# Allegro board PROCESSING-DBG.brd
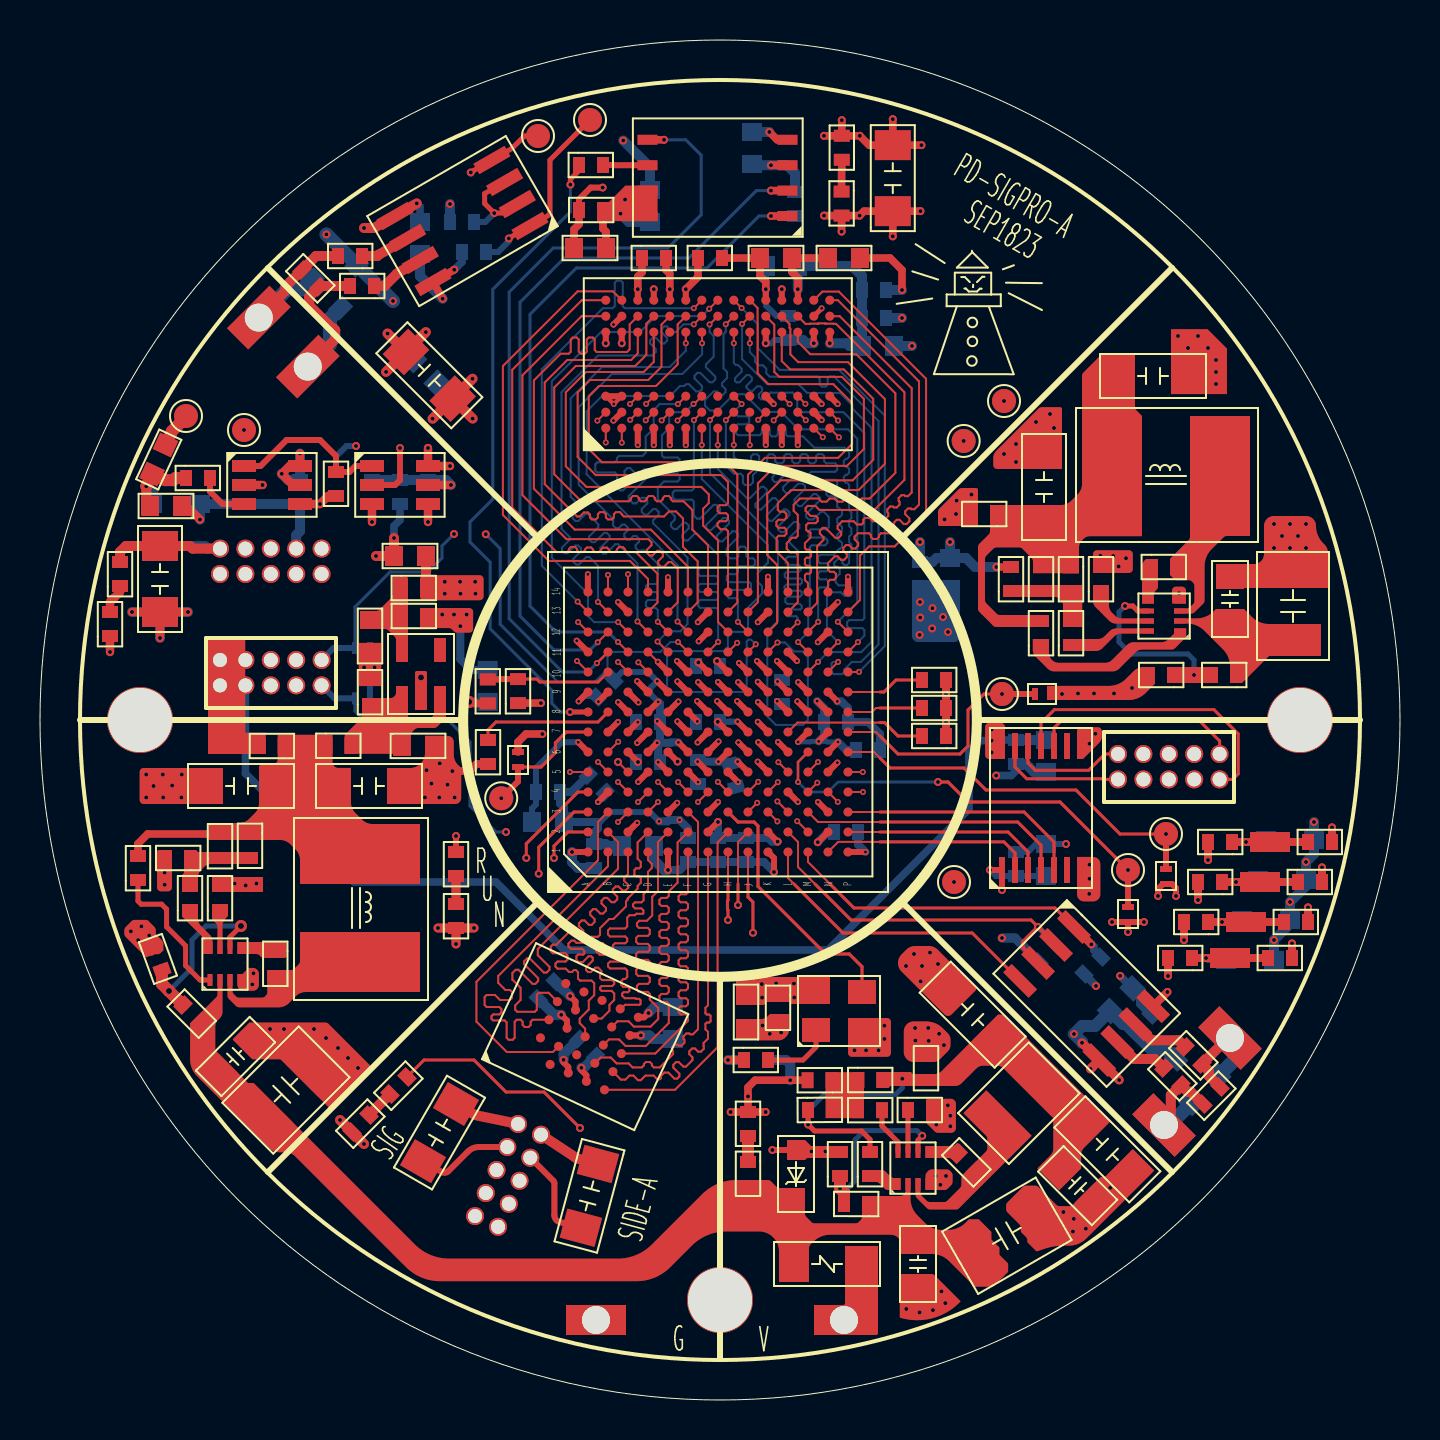
[diagram p0: board, top side]
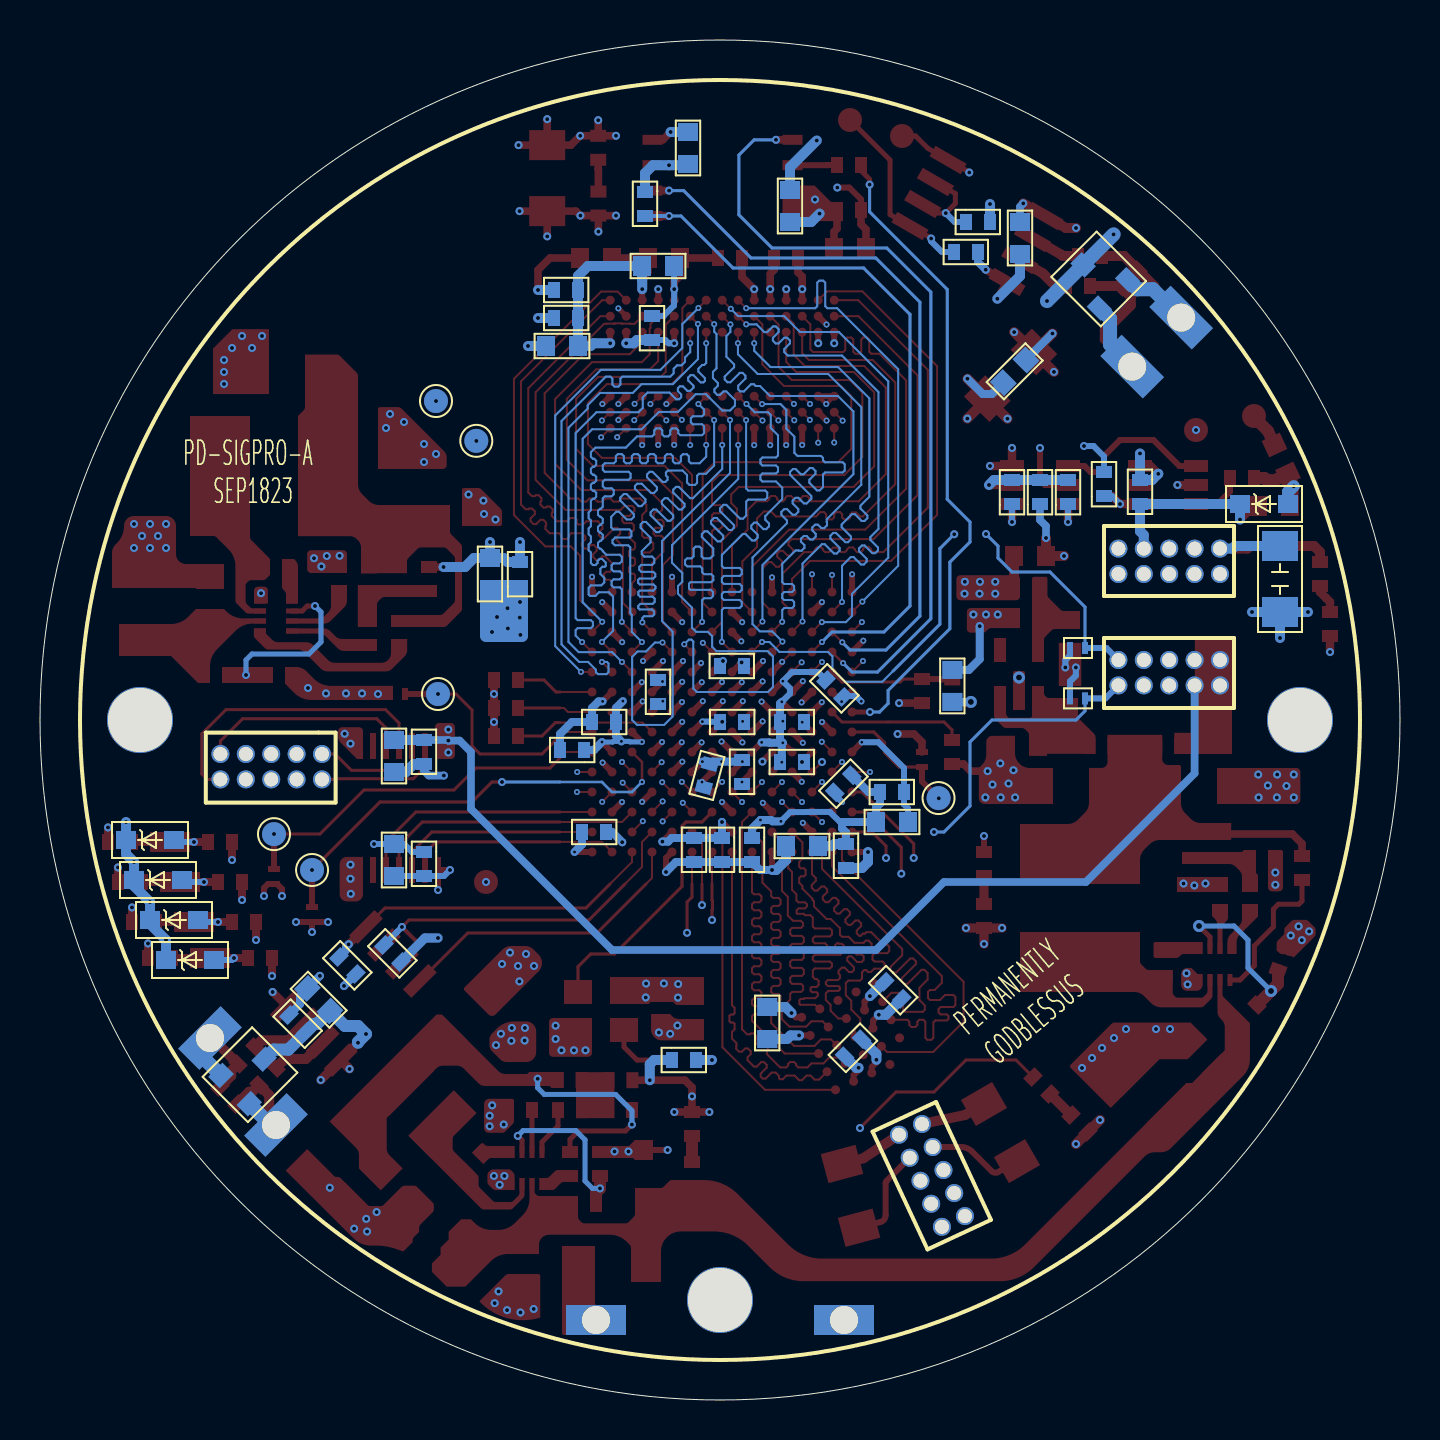
[diagram p1: board, bottom side, seen from below]

Outline 68 x 68 mm; copper layers: TOP, GND-2, VCC-3, SIGNAL-4, GND-5, BOTTOM. Coordinates in mm from the lower left corner of the outline.
Outline path: circle c34,34 r34

## Design rules (mm)
constraint set DEFAULT: min track width 0.152, pair gap 0.152
net group MG1: nets A0 A1 A2 A3 A4 A5 A6 A7 A8 A9 A10 A11 BA0 BA1 CAS CS RAS RCKE RCLK WE
net group MG2: nets S_CLK S_CS S_DQ0 S_DQ1 S_DQ2 S_DQ3 S_DQ4 S_DQ5 S_DQ6 S_DQ7 S_RST S_RWDS
net group MG4: nets DQ0 DQ1 DQ2 DQ3 DQ4 DQ5 DQ6 DQ7 DQM0
net group MG5: nets DQ8 DQ9 DQ10 DQ11 DQ12 DQ13 DQ14 DQ15 DQM1
net group MG6: nets DQ16 DQ17 DQ18 DQ19 DQ20 DQ21 DQ22 DQ23 DQM2
net group MG7: nets DQ24 DQ25 DQ26 DQ27 DQ28 DQ29 DQ30 DQ31 DQM3

## Placement (name value [footprint] x y rotation side)
C1  100nF/25V  [C0402]  28.15 59.5 180 top
C2  1uF/16V  [C0603]  28.3 57.6 180 top
C3  1uF/16V  [C0603]  36 57.1 0 top
C4  1uF/16V  [C0603]  39.4 57.1 0 top
C5  100nF/25V  [C0402]  30.1 57.1 0 top
C6  100nF/25V  [C0402]  32.9 57.1 0 top
C7  22uF/10V  [C1206]  54 51.2 0 top
C8  22uF/10V  [C1206]  50.2 44 90 top
C9  22uF/10V  [C1206]  6 42.7 270 bottom
C10  1uF/16V  [C0603]  19.3 42.2 180 top
C11  100nF/25V  [C0402]  55.6 41.65 0 top
C12  22uF/10V  [C1206]  6 42.7 270 top
C13  470pF/6.3V  [C0402]  50.05 40.45 90 top
C14  22nF/25V  [C0402]  53.05 40.45 90 top
C15  0.1uF/50V  [C0805]  59.5 38.95 90 top
C16  22uF/25V  [C1210]  62.65 41.4 270 top
C17  100nF/25V  [C0402]  18.1 39.2 0 top
C18  1uF/16V  [C0603]  16.5 39 270 top
C19  100nF/25V  [C0402]  16.5 34.8 90 top
C20  1uF/16V  [C0603]  18.1 32.7 0 top
C21  22uF/10V  [C1206]  11.7 30.7 180 top
C22  22uF/10V  [C1206]  14.8 30.7 0 top
C23  0.1uF/16V  [C0402]  63.4 27.9 0 top
C24  300pF/6.3V  [C0402]  9 27.1 90 top
C25  0.1uF/16V  [C0402]  62.9 25.9 0 top
C26  22nF/25V  [C0402]  9 24.5 90 top
C27  0.1uF/16V  [C0402]  62.2 23.9 0 top
C28  0.1uF/16V  [C0402]  61.4 22.1 0 top
C29  100nF/25V  [C0402]  11.76 22.4 270 top
C30  100nF/25V  [C0402]  36.9 20.2 270 top
C31  1uF/16V  [C0603]  35.3 20.2 270 top
C32  22uF/10V  [C1206]  47.8 18.1 135 top
C33  0.1uF/50V  [C0805]  9 16.4 45 top
C34  82pF/6.3V  [C0402]  40.92 16 0 top
C35  22uF/25V  [C1210]  13.5 16.7 225 top
C36  22nF/25V  [C0402]  43.4 14.5 0 top
C37  22uF/10V  [C1206]  52.2 13.7 315 top
C38  100nF/25V  [C0402]  45.9 12.3 315 top
C39  0.1uF/50V  [C0805]  51.11 11.5 315 top
C40  22uF/25V  [C1210]  49.82 9.06 210 top
C41  0.1uF/50V  [C0805]  43.9 7.9 270 top
C42  1uF/16V  [C0603]  35.6 61.8 90 bottom
C43  1uF/16V  [C0603]  30.5 58.9 90 bottom
C44  1uF/16V  [C0603]  19 57.3 90 bottom
C45  1uF/16V  [C0603]  37.9 56.7 180 bottom
C46  100nF/25V  [C0402]  41.1 55.5 0 bottom
C47  100nF/25V  [C0402]  41.1 54.1 0 bottom
C48  100nF/25V  [C0402]  37.4 53 90 bottom
C49  1uF/16V  [C0603]  41.1 52.7 0 bottom
C50  1uF/16V  [C0603]  45.5 40.5 90 bottom
C51  100nF/25V  [C0402]  44 40.7 90 bottom
C52  100nF/25V  [C0402]  34 36.7 180 bottom
C53  100nF/25V  [C0402]  28.7 36 225 bottom
C54  1uF/16V  [C0603]  22.38 34.9 90 bottom
C55  100nF/25V  [C0402]  37.1 36 270 bottom
C56  100nF/25V  [C0402]  39.2 33.9 0 bottom
C57  100nF/25V  [C0402]  32.8 33.9 0 bottom
C58  100nF/25V  [C0402]  31 33.9 180 bottom
C59  100nF/25V  [C0402]  26 30.4 180 bottom
C60  100nF/25V  [C0402]  40.8 32.5 0 bottom
C61  100nF/25V  [C0402]  27.41 31.24 315 bottom
C62  100nF/25V  [C0402]  48.8 33 270 bottom
C63  1uF/16V  [C0603]  50.3 33 270 bottom
C64  100nF/25V  [C0402]  31 31.9 180 bottom
C65  100nF/25V  [C0402]  32.9 32 270 bottom
C66  100nF/25V  [C0402]  34.5 31.8 285 bottom
C67  1uF/16V  [C0603]  26.2 28.9 180 bottom
C68  100nF/25V  [C0402]  39.7 28.4 0 bottom
C69  1uF/16V  [C0603]  29.1 27.7 0 bottom
C70  100nF/25V  [C0402]  35.3 28.1 270 bottom
C71  100nF/25V  [C0402]  33.9 28.1 270 bottom
C72  100nF/25V  [C0402]  32.4 28.1 270 bottom
C73  100nF/25V  [C0402]  27.7 27.8 270 bottom
C74  1uF/16V  [C0603]  50.3 27.8 270 bottom
C75  100nF/25V  [C0402]  48.8 27.4 270 bottom
C76  100nF/25V  [C0402]  25.76 20.91 225 bottom
C77  1uF/16V  [C0603]  53.5 19.45 45 bottom
C78  1uF/16V  [C0603]  31.64 18.05 90 bottom
C79  100nF/25V  [C0402]  54.7 18.4 45 bottom
C80  100nF/25V  [C0402]  27.77 17.19 135 bottom
C81  100nF/25V  [C0402]  36.4 17 180 bottom
C82  22uF/10V  [C1206]  27.9 11.8 255 top
C83  22uF/10V  [C1206]  20.8 14.8 240 top
C84  22uF/10V  [C1206]  18.3 52.4 315 top
C85  22uF/10V  [C1206]  42.64 59.44 90 top
C86  100nF/25V  [C0402]  18 44.8 90 bottom
C87  1uF/16V  [C0603]  18.7 52 315 bottom
C88  100nF/25V  [C0402]  13 46 270 bottom
D1  LED  [LED0402]  40.09 63.21 270 top
D2  LED  [LED0402]  3.5 38.2 90 top
D3  PTVS4V5D1BLYL  [SOD-882]  50.5 35.3 180 top
D4  PTVS4V5D1BLYL  [SOD-882]  23.9 32.4 270 top
D5  PTVS4V5D1BLYL  [SOD-882]  56.3 25.8 90 top
D6  PTVS4V5D1BLYL  [SOD-882]  54.4 23.9 90 top
D7  LED  [LED0402]  20.8 23.6 90 top
D8  LED  [LED0402]  15.6 13.4 45 top
D9  LED  [LED0402]  35.4 14.4 270 top
D10  PSD24-N  [SOD-323]  37.8 10.1 90 top
D11  PTVSLC3D3V3B  [SOD-323]  63.7 28 180 bottom
D12  PTVSLC3D3V3B  [SOD-323]  63.3 26 180 bottom
D13  PTVSLC3D3V3B  [SOD-323]  62.5 24 180 bottom
D14  PTVSLC3D3V3B  [SOD-323]  61.7 22 180 bottom
D15  PTVS4V5D1BLYL  [SOD-882]  16.5 37.6 180 bottom
D16  PTVS4V5D1BLYL  [SOD-882]  16.5 35.08 180 bottom
D17  PTVSLC3D3V3B  [SOD-323]  8 44.8 180 bottom
F1  24V/0.5A  [F1206]  37.7 6.8 0 top
J1  Conn-2x5  [CONN-2X5-1D27]  9 37 0 top
J2  Conn-2x5  [CONN-2X5-1D27]  53.9 32.3 0 top
J3  Conn-2x5  [CONN-2X5-1D27]  9 41.3 0 bottom
J4  Conn-2x5  [CONN-2X5-1D27]  23.9 13.8 245 bottom
L1  6.8uH/2A  [IND_SMD_6D0X6D0]  53.6 46.2 0 top
L2  6.8uH/2A  [IND_SMD_6D0X6D0]  16 27.3 270 top
L3  2.2uH/2A  [IND_SMD_3D0X3D0]  50 15.9 225 top
NOREF  -  [unnamed]  63 34 0 top
NOREF#2  -  [#2]  3.87 44.79 0 top
NOREF#3  -  [unnamed]  5 34 0 top
NOREF#4  -  [#2]  1.06 42.42 0 top
NOREF#5  -  [unnamed]  34 5 0 top
NOREF#6  -  [#2]  5 34 0 top
R1  100R  [R0402]  26.95 61.75 0 top
R2  1K  [C0402]  40.08 60.42 270 top
R3  0  [R0402]  16.1 57.2 180 top
R4  120R  [R0402]  13.1 56.5 315 top
R5  0  [R0402]  16.7 55.7 180 top
R6  2K  [C0402]  4 40.7 90 top
R7  0  [R0402]  47.8 44.3 180 top
R8  -  [R0402]  48.55 40.45 90 top
R9  51K  [R0402]  51.55 41.63 270 top
R10  0  [R0402]  18.1 40.6 0 top
R11  100K  [R0402]  50.05 37.75 90 top
R12  10K  [R0402]  51.55 37.75 90 top
R13  41.9K  [R0402]  56.65 36.25 180 top
R14  191K  [R0402]  59.8 36.25 180 top
R15  330R  [R0402]  45.3 36 180 top
R16  1K  [R0402]  22.39 36.03 270 top
R17  DNP  [R0402]  23.9 34.85 90 top
R18  4.99K  [R0402]  45.3 34.6 180 top
R19  4.99K  [R0402]  45.3 33.2 180 top
R20  0  [R0402]  12.19 32.7 180 top
R21  0  [R0402]  14.33 32.71 0 top
R22  0R  [R0402]  22.4 31.8 90 top
R23  10K  [R0402]  59.6 27.9 180 top
R24  90.9K  [R0402]  10.5 28.3 270 top
R25  10K  [R0402]  7.5 27.1 180 top
R26  2K  [C0402]  20.8 26.2 90 top
R27  100K  [R0402]  4.9 26 90 top
R28  10K  [R0402]  59.1 25.9 180 top
R29  10K  [R0402]  7.5 24.5 90 top
R30  10K  [R0402]  58.4 23.9 180 top
R31  10K  [R0402]  57.6 22.1 180 top
R32  41.9K  [R0402]  6.1 21.5 110 top
R33  191K  [R0402]  8 18.9 135 top
R34  0  [R0402]  57.25 17.65 315 top
R35  0R  [R0402]  35.2 17 0 top
R36  0  [R0402]  44.3 16 90 top
R37  0  [R0402]  56.2 16.6 315 top
R38  51K  [R0402]  39.58 15.99 180 top
R39  2K  [C0402]  17.5 15.3 45 top
R40  120R  [R0402]  58.15 14.8 45 top
R41  51K  [R0402]  38.4 14.5 0.3 top
R42  10K  [R0402]  42.1 14.49 180 top
R43  41.9K  [R0402]  40 11.2 90 top
R44  100K  [R0402]  41.5 11.2 90 top
R45  2K  [C0402]  35.4 11.9 270 top
R46  191K  [R0402]  41.4 9.8 179.9 top
R47  2K  [R0402]  37.75 60.4 270 bottom
R48  10K  [R0402]  21.7 58.9 180 bottom
R49  10K  [R0402]  22.3 57.4 180 bottom
R50  10K  [R0402]  50.8 22.75 225 bottom
R51  10K  [R0402]  53.05 22.15 225 bottom
R52  4.7K  [R0402]  19.4 44.8 90 bottom
R53  4.7K  [R0402]  16.6 44.8 90 bottom
R54  100K  [R0402]  14.8 46.4 270 top
R55  10K  [R0402]  14.8 45.2 90 bottom
R56  DNP  [R0603]  5.6 46.3 65 top
R57  DNP  [R0603]  7.1 44.7 180 top
R58  10K  [R0402]  7.3 46.1 0 top
TP1  T POINT R  [TP_SMD_1D2]  27.5 64 0 top
TP2  T POINT R  [TP_SMD_1D2]  24.9 63.2 0 top
TP3  T POINT F  [STAMP_HOLE_1D5X3D0_1D4]  10.94 54.12 135 top
TP4  T POINT F  [STAMP_HOLE_1D5X3D0_1D4]  13.39 51.67 135 top
TP5  T POINT R  [TP_SMD_1D2]  48.1 35.3 0 top
TP6  T POINT R  [TP_SMD_1D2]  46.18 47.95 0 top
TP7  T POINT R  [TP_SMD_1D2]  48.2 49.95 0 top
TP8  T POINT R  [TP_SMD_1D2]  23.06 30.09 0 top
TP9  T POINT R  [TP_SMD_1D2]  56.3 28.3 0 top
TP10  T POINT S  [TP_SMD_REC_1D0X2D0]  61.5 27.9 270 top
TP11  T POINT R  [TP_SMD_1D2]  54.4 26.5 0 top
TP12  T POINT R  [TP_SMD_1D2]  45.7 25.9 0 top
TP13  T POINT S  [TP_SMD_REC_1D0X2D0]  61 25.9 270 top
TP14  T POINT S  [TP_SMD_REC_1D0X2D0]  60.3 23.9 90 top
TP15  T POINT S  [TP_SMD_REC_1D0X2D0]  59.5 22.1 270 top
TP16  T POINT F  [STAMP_HOLE_1D5X3D0_1D4]  59.5 18.1 225 top
TP17  T POINT F  [STAMP_HOLE_1D5X3D0_1D4]  56.2 13.75 225 top
TP18  T POINT F  [STAMP_HOLE_1D5X3D0_1D4]  27.8 4 90 top
TP19  T POINT F  [STAMP_HOLE_1D5X3D0_1D4]  40.2 4 270 top
TP20  T POINT R  [TP_SMD_1D2]  48.1 35.3 180 bottom
TP21  T POINT R  [TP_SMD_1D2]  56.3 28.29 180 bottom
TP22  T POINT R  [TP_SMD_1D2]  23.07 30.1 180 bottom
TP23  T POINT R  [TP_SMD_1D2]  54.4 26.5 180 bottom
TP24  T POINT R  [TP_SMD_1D2]  46.19 47.96 180 bottom
TP25  T POINT R  [TP_SMD_1D2]  48.2 49.95 180 bottom
TP26  T POINT R  [TP_SMD_1D2]  7.3 49.2 0 top
TP27  T POINT R  [TP_SMD_1D2]  10.2 48.5 0 top
U1  N25Q064A13ESE40F  [SOP2-8]  30.38 59.2 90 top
U2  SN65HVD75DR  [SOIC-8]  24.5 58.7 210 top
U3  IS42S32400F-7BLI  [TFBGA-90]  28.29 48.59 90 top
U4  MP2338GTL  [SOT583]  55.4 38.45 90 top
U5  TLV73318PDBVR  [SOT-23-5]  18.1 35.1 90 top
U6  XC7S25-1FTGB196I  [BGA-196]  27.4 27.4 90 top
U7  LSF0204PW-Q100J  [TSSOP-14]  48.1 26.5 90 top
U8  MP2338GTL  [SOT583]  8.5 22.6 0 top
U9  SN65HVD75DR  [SOIC-8]  51.7 23.65 315 top
U10  IS66WVH8M8BLL-100B1LI  [TFBGA-24]  24.6 17.2 65 top
U11  MP2338GTL  [SOT583]  42.9 12.4 0 top
U12  CDSOT23-SM712  [SOT-23]  15.1 57.5 225 bottom
U13  CDSOT23-SM712  [SOT-23]  56.05 16.3 315 bottom
U14  ADS1110A0IDBVR  [SOT-23-6-L2D9-W1D6-PD0D95-CD2D8-MM]  16.6 46.7 0 top
U15  OPA357AIDBVR  [SOT-23-6-L2D9-W1D6-PD0D95-CD2D8-MM]  10.2 46.7 0 top
Y1  SG-8101CE 100.000000MHz  [SMD3225-4P]  38.9 20.3 0 top

## Library data of the parts
C1-C6 C10 C11 C13-C20 C23-C31 C33-C36 C38-C81 C86-C88 = CAP NP
C7-C9 C12 C21 C22 C32 C37 C82-C85 = C
D1 D2 D7-D9 = LED
D3-D6 D11-D17 = DIODE SCHOTTKY
D10 = DIODE TVS
F1 = FUSE
J1-J4 = Conn-2x5
L1-L3 = INDUCTOR
R1-R7 R9-R58 = R
R8 = R_R0402_9.09K
TP1 TP2 TP5-TP9 TP11 TP12 TP20-TP27 = T POINT R
TP3 TP4 TP16-TP19 = T POINT F
TP10 TP13-TP15 = T POINT S
U1 = N25Q064A13ESE40F
U2 U9 = SN65HVD75DR
U3 = IS42S32400F-7BLI
U4 U8 U11 = MP2338GTL
U5 = TLV73318PDBVR
U6 = XC7S25-1FTGB196C
U7 = LSF0204PW-Q100J
U10 = IS66WVH8M8BLL-100B1LI
U12 U13 = CDSOT23-SM712
U14 = ADS1110A0IDBVR
U15 = OPA357AIDBVR
Y1 = OSCILLATOR

## Footprints (pads in the part's own frame, mm; a bottom-side part is the same pattern mirrored in y, then rotated)
BGA-196
  round 0.45 smd: A1(0,0) A2(1,0) A3(2,0) A4(3,0) A5(4,0) A6(5,0) A7(6,0) A8(7,0) A9(8,0) A10(9,0) A11(10,0) A12(11,0) A13(12,0) A14(13,0) B1(0,-1) B2(1,-1) B3(2,-1) B4(3,-1) B5(4,-1) B6(5,-1) B7(6,-1) B8(7,-1) B9(8,-1) B10(9,-1) B11(10,-1) B12(11,-1) B13(12,-1) B14(13,-1) C1(0,-2) C2(1,-2) C3(2,-2) C4(3,-2) C5(4,-2) C6(5,-2) C7(6,-2) C8(7,-2) C9(8,-2) C10(9,-2) C11(10,-2) C12(11,-2) C13(12,-2) C14(13,-2) D1(0,-3) D2(1,-3) D3(2,-3) D4(3,-3) D5(4,-3) D6(5,-3) D7(6,-3) D8(7,-3) D9(8,-3) D10(9,-3) D11(10,-3) D12(11,-3) D13(12,-3) D14(13,-3) E1(0,-4) E2(1,-4) E3(2,-4) E4(3,-4) E5(4,-4) E6(5,-4) E7(6,-4) E8(7,-4) E9(8,-4) E10(9,-4) E11(10,-4) E12(11,-4) E13(12,-4) E14(13,-4) F1(0,-5) F2(1,-5) F3(2,-5) F4(3,-5) F5(4,-5) F6(5,-5) F7(6,-5) F8(7,-5) F9(8,-5) F10(9,-5) F11(10,-5) F12(11,-5) F13(12,-5) F14(13,-5) G1(0,-6) G2(1,-6) G3(2,-6) G4(3,-6) G5(4,-6) G6(5,-6) G7(6,-6) G8(7,-6) G9(8,-6) G10(9,-6) G11(10,-6) G12(11,-6) G13(12,-6) G14(13,-6) H1(0,-7) H2(1,-7) H3(2,-7) H4(3,-7) H5(4,-7) H6(5,-7) H7(6,-7) H8(7,-7) H9(8,-7) H10(9,-7) H11(10,-7) H12(11,-7) H13(12,-7) H14(13,-7) J1(0,-8) J2(1,-8) J3(2,-8) J4(3,-8) J5(4,-8) J6(5,-8) J7(6,-8) J8(7,-8) J9(8,-8) J10(9,-8) J11(10,-8) J12(11,-8) J13(12,-8) J14(13,-8) K1(0,-9) K2(1,-9) K3(2,-9) K4(3,-9) K5(4,-9) K6(5,-9) K7(6,-9) K8(7,-9) K9(8,-9) K10(9,-9) K11(10,-9) K12(11,-9) K13(12,-9) K14(13,-9) L1(0,-10) L2(1,-10) L3(2,-10) L4(3,-10) L5(4,-10) L6(5,-10) L7(6,-10) L8(7,-10) L9(8,-10) L10(9,-10) L11(10,-10) L12(11,-10) L13(12,-10) L14(13,-10) M1(0,-11) M2(1,-11) M3(2,-11) M4(3,-11) M5(4,-11) M6(5,-11) M7(6,-11) M8(7,-11) M9(8,-11) M10(9,-11) M11(10,-11) M12(11,-11) M13(12,-11) M14(13,-11) N1(0,-12) N2(1,-12) N3(2,-12) N4(3,-12) N5(4,-12) N6(5,-12) N7(6,-12) N8(7,-12) N9(8,-12) N10(9,-12) N11(10,-12) N12(11,-12) N13(12,-12) N14(13,-12) P1(0,-13) P2(1,-13) P3(2,-13) P4(3,-13) P5(4,-13) P6(5,-13) P7(6,-13) P8(7,-13) P9(8,-13) P10(9,-13) P11(10,-13) P12(11,-13) P13(12,-13) P14(13,-13)
C0402
  rect 0.6x0.8 smd: 1(0,0) 2(1.2,0)
C0603
  rect 0.9x1 smd: 1(0,0) 2(1.6,0)
C0805
  rect 1.2x1.4 smd: 1(0,0) 2(2.2,0)
C1206
  rect 1.5x1.8 smd: 1(0,0) 2(3.3,0)
C1210
  rect 1.6x2.8 smd: 1(0,0) 2(3.4,0)
CONN-2X5-1D27
  round 0.9 hole 0.7: 1(0,0) 2(0,-1.27) 3(1.27,0) 4(1.27,-1.27) 5(2.54,0) 6(2.54,-1.27) 7(3.81,0) 8(3.81,-1.27) 9(5.08,0) 10(5.08,-1.27)
F1206
  rect 1.5x1.8 smd: 1(0,0) 2(3.3,0)
IND_SMD_3D0X3D0
  rect 1.6x3.2 smd: 1(0,0) 2(3,0)
IND_SMD_6D0X6D0
  rect 3x6 smd: 1(0,0) 2(5.4,0)
LED0402
  rect 0.6x0.8 smd: 1(0,0) 2(1.2,0)
R0402
  rect 0.6x0.8 smd: 1(0,0) 2(1.2,0)
R0603
  rect 0.9x1 smd: 1(0,0) 2(1.6,0)
SMD3225-4P
  rect 1.4x1.2 smd: 1(-0.1,-1.8) 2(2.2,-1.8) 3(2.2,0.1) 4(-0.1,0.1)
SOD-323
  rect 1x0.9 smd: 1(0,0) 2(2.4,0)
SOD-882
  rect 0.3x0.6 smd: 1(0,0) 2(0.75,0)
SOIC-8
  rect 1.8x0.6 smd: 1(0,0) 2(0,-1.27) 3(0,-2.54) 4(0,-3.81) 5(5.6,-3.81) 6(5.6,-2.54) 7(5.6,-1.27) 8(5.6,0)
SOP2-8
  rect 0.5x1 smd: 1(0,-7) 2(1.27,-7) 3(2.54,-7) 4(3.81,-7) 5(3.81,0) 6(2.54,0) 7(1.27,0) 8(0,0)
SOT583
  rect 0.25x0.6 smd: 1(0,-1.6) 2(0.5,-1.6) 3(1,-1.6) 4(1.5,-1.6) 5(1.5,0) 6(1,0) 7(0.5,0) 8(0,0)
SOT-23
  rect 1x0.8 smd: 1(2.1,-2) 2(2.1,0) 3(0,-1.05)
SOT-23-5
  rect 1.2x0.6 smd: 1(0,0) 2(0,-0.95) 3(0,-1.9) 4(2.4,-1.9) 5(2.4,0)
SOT-23-6-L2D9-W1D6-PD0D95-CD2D8-MM
  rect 1.2x0.6 smd: 1(0,0) 2(0,-0.95) 3(0,-1.9) 4(2.8,-1.9) 5(2.8,-0.95) 6(2.8,0)
STAMP_HOLE_1D5X3D0_1D4
  rect 1.5x3 hole 1.4: 1(0,0)
TFBGA-24
  round 0.45 smd: A2(1,0) A3(2,0) A4(3,0) A5(4,0) B1(0,-1) B2(1,-1) B3(2,-1) B4(3,-1) B5(4,-1) C1(0,-2) C2(1,-2) C3(2,-2) C4(3,-2) C5(4,-2) D1(0,-3) D2(1,-3) D3(2,-3) D4(3,-3) D5(4,-3) E1(0,-4) E2(1,-4) E3(2,-4) E4(3,-4) E5(4,-4)
TFBGA-90
  round 0.45 smd: A1(0,0) A2(0.8,0) A3(1.6,0) A7(4.8,0) A8(5.6,0) A9(6.4,0) B1(0,-0.8) B2(0.8,-0.8) B3(1.6,-0.8) B7(4.8,-0.8) B8(5.6,-0.8) B9(6.4,-0.8) C1(0,-1.6) C2(0.8,-1.6) C3(1.6,-1.6) C7(4.8,-1.6) C8(5.6,-1.6) C9(6.4,-1.6) D1(0,-2.4) D2(0.8,-2.4) D3(1.6,-2.4) D7(4.8,-2.4) D8(5.6,-2.4) D9(6.4,-2.4) E1(0,-3.2) E2(0.8,-3.2) E3(1.6,-3.2) E7(4.8,-3.2) E8(5.6,-3.2) E9(6.4,-3.2) F1(0,-4) F2(0.8,-4) F3(1.6,-4) F7(4.8,-4) F8(5.6,-4) F9(6.4,-4) G1(0,-4.8) G2(0.8,-4.8) G3(1.6,-4.8) G7(4.8,-4.8) G8(5.6,-4.8) G9(6.4,-4.8) H1(0,-5.6) H2(0.8,-5.6) H3(1.6,-5.6) H7(4.8,-5.6) H8(5.6,-5.6) H9(6.4,-5.6) J1(0,-6.4) J2(0.8,-6.4) J3(1.6,-6.4) J7(4.8,-6.4) J8(5.6,-6.4) J9(6.4,-6.4) K1(0,-7.2) K2(0.8,-7.2) K3(1.6,-7.2) K7(4.8,-7.2) K8(5.6,-7.2) K9(6.4,-7.2) L1(0,-8) L2(0.8,-8) L3(1.6,-8) L7(4.8,-8) L8(5.6,-8) L9(6.4,-8) M1(0,-8.8) M2(0.8,-8.8) M3(1.6,-8.8) M7(4.8,-8.8) M8(5.6,-8.8) M9(6.4,-8.8) N1(0,-9.6) N2(0.8,-9.6) N3(1.6,-9.6) N7(4.8,-9.6) N8(5.6,-9.6) N9(6.4,-9.6) P1(0,-10.4) P2(0.8,-10.4) P3(1.6,-10.4) P7(4.8,-10.4) P8(5.6,-10.4) P9(6.4,-10.4) R1(0,-11.2) R2(0.8,-11.2) R3(1.6,-11.2) R7(4.8,-11.2) R8(5.6,-11.2) R9(6.4,-11.2)
TP_SMD_1D2
  round 1.2 smd: 1(0,0)
TP_SMD_REC_1D0X2D0
  rect 1x2 smd: 1(0,0)
TSSOP-14
  rect 1.3x0.3 smd: 1(0,0) 2(0,-0.65) 3(0,-1.3) 4(0,-1.95) 5(0,-2.6) 6(0,-3.25) 7(0,-3.9) 8(6.2,-3.9) 9(6.2,-3.25) 10(6.2,-2.6) 11(6.2,-1.95) 12(6.2,-1.3) 13(6.2,-0.65) 14(6.2,0)
unnamed
  round 3.3 hole 3.2 unplated: (0,0)

## Nets
1V0: C53.1 C58.1 C59.1 C61.1 C64.1 C65.1 C66.1 C67.1 C69.1 C72.1 C73.1 R36.2 U6.D6 U6.D8 U6.E5 U6.E7 U6.E9 U6.F6 U6.G5 U6.G9 U6.H6 U6.J5 U6.J9 U6.K6 U6.K8
1V8: C10.1 C52.1 C55.1 C57.1 R10.2 U6.F8 U6.F10 U6.H10 U6.K10 U6.L9
3V3: C1.1 C2.1 C3.2 C4.1 C5.1 C6.1 C30.1 C31.1 C42.1 C43.1 C44.1 C45.1 C46.1 C47.1 C48.1 C49.1 C50.1 C51.1 C54.1 C56.1 C60.1 C68.1 C70.1 C71.1 C74.2 C75.2 C76.1 C77.2 C78.1 C79.2 C80.1 C81.2 C82.1 C83.1 C84.1 C85.1 C86.2 C87.1 C88.1 J4.1 J4.2 R2.2 R7.2 R15.1 R16.2 R18.1 R19.1 R23.2 R28.2 R30.2 R31.2 R35.1 R47.1 R49.2 R51.2 R52.2 R53.2 TP6.1(TP) TP24.1(TP) U1.3(W\P\/VPP/DQ2) U1.7 U1.8 U2.8(VCC) U3.A7 U3.B2 U3.B7 U3.C9 U3.D9 U3.E1 U3.F9 U3.L1 U3.L7 U3.M9 U3.N9 U3.P2 U3.P7 U3.R7 U6.G2 U6.G13 U6.K2 U6.K13 U6.M7 U6.N2 U6.N6 U6.N7 U6.N8 U6.N13 U7.1 U7.8 U9.8(VCC) U10.B4 U10.D1 U10.E4 U14.5 U15.5 U15.6 Y1.4(VDD)
5V0: C9.1 C12.1 C62.1 C63.1 J1.1 J1.2 J1.3 J1.4 J3.1 J3.2 J3.3 J3.4 R6.2 R20.2 U7.14(REFB)
GND: C1.2 C2.2 C3.1 C4.2 C5.2 C6.2 C7.2 C8.2 C9.2 C10.2 C12.2 C14.2 C15.2 C16.1 C17.2 C18.2 C19.2 C20.2 C21.2 C22.2 C23.2 C25.2 C26.2 C27.2 C28.2 C30.2 C31.2 C32.2 C33.2 C35.1 C36.2 C37.2 C39.2 C40.1 C41.2 C42.2 C43.2 C44.2 C45.2 C46.2 C47.2 C48.2 C49.2 C50.2 C51.2 C52.2 C53.2 C54.2 C55.2 C56.2 C57.2 C58.2 C59.2 C60.2 C61.2 C62.2 C63.2 C64.2 C65.2 C66.2 C67.2 C68.2 C69.2 C70.2 C71.2 C72.2 C73.2 C74.1 C75.1 C76.2 C77.1 C78.2 C79.1 C80.2 C81.1 C82.2 C83.2 C84.2 C85.2 C86.1 C87.2 C88.2 D1.1(CATHODE) D2.1(CATHODE) D3.1 D4.1 D5.1 D6.1 D7.1(CATHODE) D8.1(CATHODE) D9.1(CATHODE) D10.2 D11.1 D12.1 D13.1 D14.1 D15.1 D16.1 D17.1 J1.5 J1.6 J1.7 J1.8 J3.7 J3.8 J3.9 J3.10 J4.3 J4.4 R8.2 R13.2 R17.1 R22.1 R25.2 R32.2 R38.2 R43.2 R48.2 R50.2 R55.2 R57.1 TP7.1(TP) TP18.1(TP) TP25.1(TP) TP27.1(TP) U1.4 U2.5 U3.A3 U3.B3 U3.B8 U3.C1 U3.D1 U3.E9 U3.F1 U3.L3 U3.L9 U3.M1 U3.N1 U3.P3 U3.P8 U3.R3 U4.4 U5.2 U6.A1 U6.A6 U6.A9 U6.A11 U6.A14 U6.B4 U6.B7 U6.B9 U6.C2 U6.C6 U6.C7 U6.C8 U6.C9 U6.C13 U6.D5 U6.D7 U6.D9 U6.D11 U6.E1 U6.E3 U6.E6 U6.E8 U6.E10 U6.E14 U6.F5 U6.F7 U6.F9 U6.G3 U6.G6 U6.G7 U6.G8 U6.G10 U6.G12 U6.H5 U6.H7 U6.H8 U6.H9 U6.J6 U6.J7 U6.J8 U6.J10 U6.K1 U6.K5 U6.K7 U6.K9 U6.K14 U6.L4 U6.L6 U6.L8 U6.L10 U6.L11 U6.M8 U6.M9 U6.N3 U6.N5 U6.N9 U6.N12 U6.P1 U6.P14(GND#P14) U7.7 U8.4 U9.5 U10.B3 U10.C1 U10.E5(VSSQ#E5) U11.4 U12.3 U13.3 U14.2 U14.6(VIN-) U15.2(V-) Y1.2
VIN: C33.1 C35.2 C40.2 C41.1 D10.1(CATHODE) F1.1 R33.1 R45.2 R46.1 U8.2(VIN) U11.2(VIN)
VIN2: C15.1 C16.2 R14.1 U4.2(VIN)
A0: U3.G8 U6.B13
A1: U3.G9 U6.A13
A2: U3.F7 U6.D12
A3: U3.F3 U6.E11
A4: U3.G1 U6.J11
A5: U3.G2 U6.J12
A6: U3.G3 U6.G11
A7: U3.H1 U6.L12
A8: U3.H2 U6.K11
A9: U3.J3 U6.N11
A10: U3.G7 U6.E12
A11: U3.H9 U6.C12
AUX_PWR_EN: D16.2(CATHODE) J1.10 U6.C3
BA0: U3.J7 U6.P11
BA1: U3.H8 U6.F12
CAS: U3.K7 U6.N10
CCLK: R1.1 U6.A8
CLK_100M: U6.H3 Y1.3
CS: U3.J8 U6.P12
DIR: R50.1 U6.L2 U9.2 U9.3
DIR2: R48.1 U2.2 U2.3 U6.B5
DQ0: U3.R8 U6.M13
DQ1: U3.N7 U6.L13
DQ2: U3.R9 U6.N14
DQ3: U3.N8 U6.M14
DQ4: U3.P9 U6.P13
DQ5: U3.M8 U6.L14
DQ6: U3.M7 U6.K12
DQ7: U3.L8 U6.J13
DQ8: U3.L2 U6.J4
DQ9: U3.M3 U6.K4
DQ10: U3.M2 U6.L5
DQ11: U3.P1 U6.P5
DQ12: U3.N2 U6.M5
DQ13: U3.R1 U6.P4
DQ14: U3.N3 U6.M4
DQ15: U3.R2 U6.N4
DQ16: U3.E8 U6.H14
DQ17: U3.D7 U6.H12
DQ18: U3.D8 U6.G14
DQ19: U3.B9 U6.D14
DQ20: U3.C8 U6.F14
DQ21: U3.A9 U6.D13
DQ22: U3.C7 U6.F13
DQ23: U3.A8 U6.E13
DQ24: U3.A2 U6.A12
DQ25: U3.C3 U6.B6
DQ26: U3.A1 U6.B14
DQ27: U3.C2 U6.C14
DQ28: U3.B1 U6.C10
DQ29: U3.D2 U6.D10
DQ30: U3.D3 U6.A10
DQ31: U3.E2 U6.E4
DQM0: U3.K9 U6.J14
DQM1: U3.K1 U6.H4
DQM2: U3.F8 U6.H13
DQM3: U3.F2 U6.F4
HVPS_EN: D15.2(CATHODE) J1.9 U6.F11
I2C_SCL: R53.1 U6.D4 U14.3
I2C_SDA: R52.1 U6.C4 U14.4
IO_A2: J4.5 U6.A2
IO_A3: J4.7 U6.A3
IO_A4: J4.9 U6.A4
IO_H1: J4.6 U6.H1
IO_J1: J4.10 U6.J1
IO_J2: J4.8 U6.J2
KEY_NEXT: C25.1 D12.2(CATHODE) R28.1 TP13.1(TP) U6.M2
KEY_OKAY: C27.1 D13.2(CATHODE) R30.1 TP14.1(TP) U6.K3
KEY_PAUSE: C28.1 D14.2(CATHODE) R31.1 TP15.1(TP) U6.J3
KEY_PREV: C23.1 D11.2(CATHODE) R23.1 TP10.1(TP) U6.L3
LED1: R39.2 U6.H11
LED2: R26.2 U6.D3
NC.E3: U3.E3
NC.E4: U3.E7
NC.H3: U3.H3
NC.H7: U3.H7
NC.K2: U3.K2
NC.K3: U3.K3
PLSE: U6.P3 U7.5
PLSE2: U6.M3 U7.4
PULSE: J2.9 U7.10
PULSE2: J2.10 U7.11
QUENCH: U6.N1 U7.2
QUENCH_VOLTAGE_DOWN: J2.2 U7.13
RAS: U3.J9 U6.P10
RCKE: U3.J2 U6.M11
RCLK: U3.J1 U6.M12
RESET_DISCHARGE: J2.1 U7.12
RST_DIS: U6.P2 U7.3
RXD: R51.1 U6.M1 U9.1
RXD2: R49.1 TP1.1(TP) U2.1 U6.A5
S_CLK: U6.B3 U10.B2
S_CS: U6.B1 U10.A3
S_DQ0: U6.F2 U10.D3
S_DQ1: U6.F3 U10.D2
S_DQ2: U6.D2 U10.C4
S_DQ3: U6.E2 U10.D4
S_DQ4: U6.D1 U10.D5
S_DQ5: U6.F1 U10.E3
S_DQ6: U6.G1 U10.E2
S_DQ7: U6.H2 U10.E1
S_RST: U6.B2 U10.A4
S_RWDS: U6.C1 U10.C3
SPI_CLK: R1.2 U1.6
SPI_CS: R47.2 U1.1 U6.C11
SPI_MISO: U1.2 U6.B12
SPI_MOSI: U1.5 U6.B11
TCK: D4.2(CATHODE) TP8.1(TP) TP22.1(TP) U6.A7
TDI: D3.2(CATHODE) TP5.1(TP) TP20.1(TP) U6.P7
TDO: D5.2(CATHODE) TP9.1(TP) TP21.1(TP) U6.P6
TMS: D6.2(CATHODE) TP11.1(TP) TP23.1(TP) U6.M6
TXD: U6.L1 U9.4
TXD2: TP2.1(TP) U2.4 U6.C5
WE: U3.K8(WE#) U6.M10
N08019: R22.2 U6.B8
N09069: R15.2 U6.P9
N09161: R19.2 U6.L7
N09273: R18.2 U6.P8
N22324: R35.2 Y1.1
N24086: R16.1 R17.2 U6.B10
N26836: D8.2 R39.1
N26840: D7.2 R26.1
N27618: D9.2 R45.1
N75966: C36.1 U11.7
N78541: C38.1 U11.5
N78551: C38.2 L3.2 U11.3
N79037: C32.1 C34.2 C37.1 C39.1 L3.1 R36.1 R41.1 R44.2
N82096: C34.1 R38.1 R41.2 R42.2
N83655: R42.1 U11.8
N84933: R43.1 R46.2 U11.6
N87531: R44.1 U11.1
N103533: C11.1 U4.5
N103537: C11.2 L1.2 U4.3
N103609: R13.1 R14.2 U4.6
N103629: C7.1 C8.1 C13.2 L1.1 R7.1 R9.1 R11.2
N103737: C14.1 U4.7
N103745: R12.1 U4.8
N103749: C13.1 R8.1 R9.2 R12.2
N103869: R11.1 U4.1
N128857: C29.1 U8.5
N128861: C29.2 L2.2 U8.3
N128935: R32.1 R33.2 U8.6
N128955: C21.1 C22.1 C24.2 L2.1 R20.1 R21.1 R24.1 R27.2
N128987: C19.1 C20.1 R21.2 U5.1 U5.3
N129065: C26.1 U8.7
N129073: R29.1 U8.8
N129077: C24.1 R24.2 R25.1 R29.2
N129197: R27.1 U8.1
N136274: C17.1 C18.1 R10.1 U5.5(OUT)
N374570: F1.2 TP19.1(TP)
N577952: R34.1 U9.7
N578881: R37.1 U9.6
N579779: R34.2 R40.2 TP16.1(TP) U13.1
N579791: R37.2 R40.1 TP17.1(TP) U13.2
N655574: R4.2 R5.2 TP4.1(TP) U12.1
N655736: R3.2 R4.1 TP3.1(TP) U12.2
N657185: R5.1 U2.7
N657197: R3.1 U2.6
N666673: D1.2 R2.1
N698760: D2.2 R6.1
N712246: TP12.1(TP) U6.G4
N753902: R54.1 U14.1 U15.1
N754234: R54.2 R55.1 U15.4
N759022: D17.2(CATHODE) R56.1 R57.2 R58.1
N759114: R56.2 TP26.1(TP)
N7492892: R58.2 U15.3

Pads without a net: J2 3 4 5 6 7 8; J3 5 6; U5 4; U7 6 9; U10 A2 A5 B1 B5 C2 C5

## Via types
v1: diameter 0.4, hole 0.2, TOP to BOTTOM, 308 vias
v2: diameter 0.3, hole 0.15, TOP to BOTTOM, 185 vias
v3: diameter 0.6, hole 0.3, TOP to BOTTOM, 4 vias

## Routing (per net, layer and track width the routed paths; a pad name or vN(x,y) marks a point on that pad's centre or on a via; arc(x,y) is an arc through that point)
1V0: length 90.6
  TOP w0.3: U6.G5 v2(32.88,31.92) ; U6.J9 v2(34.91,35.89) ; U6.J5 v2(34.88,31.92) ; U6.D6 v2(30.86,32.86) ; U6.E7 v2(30.86,33.94) ; U6.E9 v2(30.86,35.94) ; U6.G9 v2(32.91,35.89) ; U6.K8 v2(35.9,34.9) ; U6.H6 v2(33.92,31.92) ; U6.F6 v2(31.92,32.88) ; U6.D8 v2(30.91,34.91) ; U6.K6 v2(35.91,32.89) ; U6.E5 v2(30.91,31.89)
  VCC-3 w0.2: v2(30.86,32.86) 31.24,32.86 31.26,32.88 v2(31.92,32.88) v2(32.88,31.92) v2(33.92,31.92) v2(34.88,31.92) 35.17,32.21 35.24,32.21 v2(35.91,32.89) 36.56,33.54 36.56,34.24 v2(35.9,34.9) v2(34.91,35.89) 34.48,35.46 33.34,35.46 v2(32.91,35.89) ; v2(30.86,32.86) 30.86,32.46 30.91,32.41 v2(30.91,31.89) ; v2(30.86,32.86) v2(30.86,33.94) 30.86,34.46 30.91,34.51 v2(30.91,34.91) 30.91,35.29 30.86,35.34 v2(30.86,35.94)
  VCC-3 w0.25: 44.42,17.97 v1(43.77,17.97) 43.75,17.99 v1(43.75,18.6) ; 44.42,17.97 v1(44.43,17.96) 44.6,17.96 v1(44.95,18.31) ; 44.42,17.97 44.41,17.98 v1(44.41,18.6) ; v1(44.95,18.31) 44.95,17.99 v1(45.2,17.75) ; v1(44.95,18.31) 44.66,18.6 v1(44.41,18.6) ; v1(44.41,18.6) v1(43.75,18.6) ; v1(43.75,18.6) 43.23,18.08 43.23,17.69 40.65,15.11 36.8,15.11 36.02,15.89 33.64,15.89 32.83,16.7 32.83,22.31 29.83,25.31 29.83,27.06 30.95,28.19 v2(30.95,28.93) ; v2(31.98,29) 32.26,29.28 32.26,29.66 32.29,29.68 32.29,29.83 32.47,30.02 32.47,30.08 32.72,30.33 33.08,30.33 33.33,30.08 33.47,30.08 33.72,30.33 34.1,30.33 34.27,30.16 34.81,30.16 35.88,29.09 35.95,29.09 36.39,29.53 36.39,32.41 v2(35.91,32.89)
  BOTTOM w0.1: v2(30.86,33.94) 30.96,33.94 C58.1
  BOTTOM w0.3: 27.9,28.9 28,28.9 28.5,29.4 29.69,29.4 29.69,29.4 30.49,29.4 v2(30.95,28.93) ; v2(30.91,34.91) 30.5,35.32 30.5,35.58 v2(30.86,35.94) 30.4,36.4 29.1,36.4 C53.1
  BOTTOM w0.4: v2(32.88,31.92) v2(33.92,31.92) 34.38,31.92 C66.1 34.62,31.92 v2(34.88,31.92) ; C61.1 26.58,30.4 C59.1 26,29.82 26.2,29.62 C67.1 27.9,28.9 27.9,28.58 27.7,28.38 C73.1 ; C72.1 32.4,28.58 v2(31.98,29) 31.45,29 31.38,28.93 v2(30.95,28.93) ; v2(30.86,32.86) 31.52,32.86 31.54,32.88 v2(31.92,32.88) ; v2(30.86,32.86) 30.91,32.81 v2(30.91,31.89) ; v2(30.86,32.86) 31,33 C58.1 31,34.82 v2(30.91,34.91)
  BOTTOM w0.5: C73.1 28.28,27.8 28.38,27.7 C69.1
1V8: length 29.8
  TOP w0.3: U6.K10 v2(35.85,36.95) ; U6.H10 v1(33.85,36.95) ; U6.F8 v2(32.87,33.93) ; U6.L9 v2(36.88,35.92) ; U6.F10 v2(31.85,36.95)
  TOP w0.5: R10.2 C10.1
  VCC-3 w0.1: 35.18,37.4 35.26,37.32 35.48,37.32
  VCC-3 w0.2: v2(32.87,33.93) 32.32,34.48 32.32,35.09 32.23,35.18 32.23,35.72 32.27,35.76 32.27,36.1 32.23,36.14 32.23,36.57 v2(31.85,36.95) ; v2(31.85,36.95) 31.4,37.4 31.4,39.4 30.2,40.6 26.7,40.6 26.39,40.91 v1(21.76,40.91) v1(21,40.91) ; v2(31.85,36.95) 32.3,37.4 33.4,37.4 v1(33.85,36.95) 34.3,37.4 35.4,37.4 v2(35.85,36.95) v2(36.88,35.92) ; v1(21.02,40.31) v1(21.77,40.31)
  BOTTOM w0.1: v2(32.87,33.93) 32.83,33.93 C57.1
  vias: v1(20.24,40.91) v1(20.24,40.31)
3V3: length 422.4
  TOP w0.3: U3.L7 v1(36.29,52.84) ; U6.N6 v2(39.9,32.9) ; U6.N13 v2(39.89,39.89) ; U3.M9 v1(37.09,55.54) ; U3.P7 v1(38.69,52.84) ; U6.G13 v2(32.89,38.89) ; v1(26.5,20.2) 26.77,19.93 U10.B4 ; U3.L1 v2(36.29,47.76) ; U3.R7 v1(39.49,52.84) ; U3.N9 v1(37.89,55.54) ; U6.K13 v2(35.89,38.89) ; v1(48.1,25.5) U7.1 v1(47.5,26.5) ; U3.C9 v1(29.89,55.54) ; U3.B2 v2(28.67,48.97) ; U6.N8 v2(38.86,34.95) ; U10.D1 27.32,16.24 27.07,16.49 v1(27.07,16.61) ; U3.E1 v2(31.49,47.74) ; U6.K2 v1(36.88,27.92) ; U6.G2 v1(33.9,28.9) ; U6.N7 v2(38.93,32.93) ; U3.P2 v2(39.08,49) ; U6.M7 v2(37.9,32.9) ; U3.F9 v1(32.29,55.54) ; U10.E4 v1(30.05,18.23) ; U3.B7 v1(29.09,52.84) ; U3.A7 v1(28.29,52.84) ; U6.N2 v1(38.89,27.89) ; U3.D9 v1(30.69,55.54)
  TOP w0.38: C6.1 32.9,56.15 v1(32.29,55.54) ; v1(37.89,55.54) 37.9,55.55 37.9,56.1 37.6,56.4 C3.2 C4.1 ; C85.1 41.2,59.44 v1(40.98,59.22) R2.2 ; C85.1 v1(42.64,58.18) ; C85.1 v1(44.02,59.44) ; v1(29.89,55.54) 29.89,56.17 30.1,56.38 C5.1 ; v1(20.71,56.51) 20.71,56.51 20.7,56.5 U2.8 v1(20.13,55.06) ; R2.2 v1(39.2,59.22) ; R2.2 v1(40.08,58.42) ; v3(21.46,34.9) 21.54,34.83 R16.2 ; C1.1 28.15,58.57 28.3,58.42 C2.1 ; R35.1 v1(34.4,17) ; U1.3 v1(36.55,61.74)
  TOP w0.4: R28.2 v1(57.9,25) ; R31.2 v1(56.4,21.2) ; R15.1 v1(45.3,35.3) R18.1 v1(45.3,33.9) R19.1 ; R30.2 v1(57.2,23) ; R23.2 v1(58.4,27) ; U9.8 v1(56.37,20.4)
  TOP w0.42: U15.5 12.64,45.75 v1(12.09,46.31) 12.48,46.7 U15.6 v1(13,47.33) ; U14.5 v1(20.55,45.75)
  TOP w0.5: C82.1 26.83,12.09 J4.2 ; C84.1 v1(19.29,53.4) ; C84.1 v1(17.38,53.32) ; C84.1 v1(17.3,51.4) ; J4.1 21.76,14.25 C83.1
  VCC-3 w0.152: v1(36.81,20.83) 36.12,20.83 v1(36.09,20.8) 36.1,20.79 v1(36.1,20.12) 36.5,20.12 36.51,20.13 36.84,20.13 ; v1(36.81,20.83) 37.21,20.83 37.21,20.82 v1(37.7,20.82) 37.7,20.14 v1(37.71,20.13) 36.84,20.13 ; v1(36.81,20.83) 36.81,20.16 36.84,20.13
  VCC-3 w0.16: v2(39.08,49) 39.54,48.54 42.94,48.54 43.1,48.7
  VCC-3 w0.3: v1(37.89,55.54) 37.89,56.8 37.49,57.2 37.09,57.2 ; 31.49,45.6 35.7,45.6 36.3,46.2 ; 31.49,45.6 v2(31.49,47.74) ; 31.49,45.6 26.2,45.6 25.3,46.5 25.3,49.2 26,49.9 28.2,49.9 28.23,49.87 28.23,49.61 28.67,49.17 v2(28.67,48.97) ; 32.3,57.2 32.3,60.4 33.64,61.74 v1(36.55,61.74) 38.36,61.74 39.2,60.9 v1(39.2,59.22) 40.07,59.22 40.08,59.21 ; 32.3,57.2 37.09,57.2 ; 32.3,57.2 32.29,57.19 v1(32.29,55.54) ; 32.3,57.2 31.09,57.2 30.69,56.8 ; 50.55,30.65 50.55,32.39 50.98,32.82 v1(52.48,32.82) ; 50.55,30.65 47.8,27.9 47.5,27.9 ; 50.55,30.65 53.1,28.1 54.4,28.1 55.5,27 v1(58.4,27) 58.4,25.5 v1(57.9,25) 57.9,23.7 v1(57.2,23) 56.4,22.2 v1(56.4,21.2) ; v2(37.9,32.9) 38.53,32.9 38.55,32.93 v2(38.93,32.93) ; 38.6,40.13 38.6,42.3 39.41,43.11 ; 38.6,40.13 38.84,39.89 v2(39.89,39.89) 40.37,39.89 40.38,39.9 42.1,39.9 ; 38.6,40.13 38.57,40.11 35.89,40.11 35.89,40.11 ; v1(56.4,21.2) 56.02,21.2 56.02,21.21 v1(54.01,21.21) 53.3,21.21 v1(52.8,20.7) ; v1(56.4,21.2) 56.4,20.81 56.37,20.78 v1(56.37,20.4) ; 30.69,56.8 30.06,56.8 29.91,56.65 ; 30.69,56.8 v1(30.69,55.54) ; 36.1,51.1 31.84,51.1 31.69,51.25 31.11,51.25 31.01,51.15 30.78,51.15 v1(29.09,52.84) v1(28.29,52.84) ; 36.1,51.1 36.29,51.29 v1(36.29,52.84) ; 36.1,51.1 38.5,51.1 38.6,51.2 ; 42.1,39.9 42.1,35.9 42,35.8 ; 42.1,39.9 v1(44,39.9) ; v1(40.98,59.22) 40.09,59.22 40.08,59.21 ; 36.3,46.2 39.39,43.11 39.41,43.11 ; 36.3,46.2 36.29,46.21 v2(36.29,47.76) ; v1(29.25,60.02) 29.25,59.55 v1(29.02,59.32) 29.02,57.54 29.91,56.65 ; v2(32.89,38.89) 34.11,40.11 35.89,40.11 ; 25.73,15.27 25.05,14.59 J4.2 24.51,13.8 J4.1 ; 25.73,15.27 v1(27.07,16.61) 27.07,18.37 28.49,19.79 ; 25.73,15.27 27.78,15.27 31.42,11.64 40.64,11.64 46.7,17.7 46.7,23.6 48.1,25 v1(48.1,25.5) 48.1,25.9 v1(47.5,26.5) 47.5,27.9 ; 42,35.8 42.1,35.8 42.3,35.6 42.3,34.6 ; 42,35.8 39.2,35.8 38.86,35.45 v2(38.86,34.95) 38.86,34.47 38.93,34.39 v2(38.93,32.93) ; 47.5,27.9 45.6,27.9 44,29.5 44,31.4 45.3,32.7 v1(45.3,33.9) v1(45.3,35.3) 44.6,34.6 42.3,34.6 ; v1(36.09,20.8) 34.4,19.11 v1(34.4,17) ; v1(33.9,28.9) 33.9,28.5 34.5,27.9 36.48,27.9 36.5,27.92 v1(36.88,27.92) 37.26,27.92 37.29,27.89 37.9,27.89 ; v2(35.89,38.89) 35.89,40.11 ; v1(19.29,53.4) 19.29,54.22 v1(20.13,55.06) 22.3,55.06 ; 29.91,56.65 29.89,56.63 v1(29.89,55.54) 24.44,55.54 23.96,55.06 22.3,55.06 ; v1(38.69,52.84) 38.6,52.75 38.6,51.2 ; 43.1,46.8 44,46.8 v1(45.83,44.97) ; 43.1,46.8 39.41,43.11 ; 43.1,46.8 43.1,49.5 40.65,51.95 39.35,51.95 ; 22.3,55.06 22.3,55.9 21.69,56.51 v1(20.71,56.51) ; 37.09,57.2 v1(37.09,55.54) ; v1(37.7,20.82) 37.7,27.69 37.9,27.89 ; 42.3,34.6 42.3,29.7 40.49,27.89 v1(38.89,27.89) 37.9,27.89 ; v2(38.93,32.93) 39.49,32.93 39.52,32.9 v2(39.9,32.9) ; 39.35,51.95 39.49,52.09 v1(39.49,52.84) ; 39.35,51.95 38.6,51.2 ; 40.08,59.21 v1(40.08,58.42) ; 28.49,19.79 v1(30.05,18.23) ; 28.49,19.79 28.08,20.2 v1(26.5,20.2) ; v1(46.57,45.27) 46.57,46.35 46.22,46.71 46.22,47.44 46.18,47.48 v1(46.18,47.95)
  VCC-3 w0.38: v1(52.48,32.82) 52.77,33.11 v1(52.77,33.31) ; v1(44.62,39.59) 44.16,39.12 v1(44.01,39.12) 43.98,39.09 v1(43.98,38.26) 44.3,38.58 v1(44.61,38.58) 44.78,38.4 v1(45.4,38.4) 45.15,38.65 v1(45.15,39.15) 45.06,39.15 v1(44.62,39.59) ; v1(44.62,39.59) 44.31,39.59 v1(44,39.9) ; v1(28.29,52.84) 25.41,52.84 24.91,53.35 24.91,54.12 23.96,55.06 ; 26.2,45.6 24.79,44.19 22.62,44.19 22.4,43.96 21.87,43.96 21.64,44.19 20.82,44.19 20.78,44.14 20.43,44.14 20.06,43.77 20.06,43.42 18.28,41.65 18.28,38.69 21.46,35.52 v3(21.46,34.9) ; v1(46.57,45.27) 46.14,45.27 v1(45.83,44.97) 45.83,44.33 v1(45.8,44.3) 45.5,44.3 v1(45.23,44.03) ; v1(19.29,53.4) 17.97,53.4 17.9,53.32 v1(17.38,53.32) 17.38,52 17.3,51.92 v1(17.3,51.4) ; v1(40.98,59.22) 42.02,58.18 v1(42.64,58.18) 43.53,59.08 43.66,59.08 v1(44.02,59.44)
  BOTTOM w0.25: v2(37.9,32.9) 38.5,32.9 38.53,32.93 v2(38.93,32.93) 39.33,32.93 39.36,32.9 v2(39.9,32.9)
  BOTTOM w0.3: v1(36.29,52.84) 36.57,52.84 36.73,53 C48.1 ; v1(47.5,26.5) 47.8,26.2 C75.2 C74.2
  BOTTOM w0.38: v1(20.71,56.51) 21.1,56.9 R49.2
  BOTTOM w0.4: v2(39.9,32.9) 40.3,32.5 C60.1 ; v1(17.38,53.32) 18.26,52.45 18.26,52.44 C87.1 ; v2(38.93,32.93) 39.2,33.2 C56.1 39.2,34.6 v2(38.86,34.95) ; v1(33.9,28.9) C71.1 C70.1 36.41,28.1 36.59,27.92 v1(36.88,27.92) ; v1(54.01,21.21) C77.2 55,20.21 55,19.8 C79.2 ; C54.1 v3(21.46,34.9) ; R51.2 v1(52.8,20.7) ; C68.1 U6.N2 v1(38.89,27.89)
  BOTTOM w0.5: v1(20.55,45.75) 20.3,46 R52.2 C86.2 R53.2 ; v1(29.02,59.32) 29.44,58.9 C43.1 ; v1(37.89,55.54) 37.89,56.01 37.9,56.02 C45.1 40.6,56.7 41.1,56.2 C46.1 C47.1 C49.1 40.47,52.7 40.34,52.84 v1(39.49,52.84) ; v1(27.07,16.61) 27.19,16.61 C80.1 ; v1(38.69,52.84) 38.31,52.84 38.15,53 C48.1 ; R35.1 v1(34.4,17) ; C76.1 26.17,20.5 26.2,20.5 v1(26.5,20.2) ; R47.1 37.75,61.34 37.35,61.74 v1(36.55,61.74) 35.66,61.74 C42.1 ; C78.1 30.65,18.05 30.47,18.23 v1(30.05,18.23) ; v1(20.13,55.06) 19,56.2 C44.1 ; v1(13,47.33) C88.1 12.4,46 12.09,46.31 v1(12.09,46.31)
5V0: length 81.6
  TOP w0.5: R6.2 4,42.4 4.3,42.7 C12.1 7.5,42.7 7.63,42.57 J3.2
  VCC-3 w0.38: J1.3 J1.4 J1.2 J1.1 ; J1.3 J3.3 ; J1.3 J1.1 ; J3.1 J3.2 J3.4 J3.3 ; J3.1 J3.3 ; J3.1 J1.1
  BOTTOM w0.38: C62.1 47.61,33 v1(47.58,32.97) 47.02,32.97 46.45,32.4 46.45,29.55 39.4,22.5 26.2,22.5 22.8,25.9 15.7,25.9 10.27,31.33 J1.4
  BOTTOM w0.5: J3.2 8.37,42.57 8.24,42.7 C12.1 ; C63.1 C62.1
  vias: v1(47.58,33.52) v1(47.58,32.38)
GND: length 233.1
  TOP w0.1: U6.D11 v2(30.89,36.91)
  TOP w0.2: U3.A3 28.68,49.8 v2(28.69,49.8) 28.7,49.8 U3.B3
  TOP w0.25: U3.P8 v2(39.08,54.58)
  TOP w0.3: U3.R3 v2(39.88,49.8) ; U3.C1 v2(29.89,47.75) ; U6.J6 v2(34.92,32.88) ; D6.1 v1(54.4,23.4) ; D6.1 v1(55.2,23.9) ; D6.1 v1(53.6,23.9) ; U6.E6 v1(31.88,31.92) ; U6.C6 v1(29.9,31.9) ; U6.H7 v1(33.89,33.91) ; U6.N9 v2(39.87,34.93) ; U6.J7 v2(34.88,33.92) ; U6.K9 v2(35.89,35.91) ; v1(55.9,25.2) 55.9,25.55 56.15,25.8 D5.1 56.6,25.8 56.8,25.6 v1(56.8,25.2) ; U6.C2 v2(29.86,28.86) ; U6.N3 v2(38.9,29.9) ; U6.C7 v2(29.89,33.89) ; U6.K5 v2(35.88,31.91) ; J4.3 21.96,12.65 arc(21.65,12.59) 21.39,12.41 20.4,11.43 arc(20.26,11.36) 20.11,11.39 C83.2 ; U6.F9 v2(31.87,35.93) ; U6.M8 v2(37.87,34.93) ; U6.K14 v2(36.4,41.16) ; U6.D9 v2(29.86,35.94) ; U6.B9 v2(27.92,34.92) ; U6.G12 v2(32.94,37.94) ; v1(36.7,26.4) 36.7,27.1 U6.K1 ; v1(30.42,19.35) 30.21,19.13 U10.E5 ; U10.C1 26.41,16.65 26.18,16.88 v1(26.18,17.01) ; D10.2 v1(36.62,12.5) ; U6.H8 v2(33.86,34.94) ; U3.N1 v2(37.89,47.75) ; U10.B3 26.35,18.97 v1(26.06,19.26) ; U6.G3 v2(33.9,29.9) ; U6.B4 v2(27.9,29.9) ; U6.E14 v2(31.4,41.13) ; v2(27.39,41.28) 27.39,40.51 27.4,40.51 U6.A14 ; U6.G10 v1(32.92,36.88) ; U6.E3 v2(31.86,29.86) ; U3.L3 v2(36.68,49.8) ; C1.2 26.95,60.04 27.54,60.62 v1(28.13,60.62) ; U6.D5 v2(29.91,30.91) ; U6.E10 v2(30.89,36.91) ; U6.F5 v2(32.9,30.9) ; U6.F7 v2(31.87,33.93) ; U6.E8 v2(31.92,34.92) ; U3.A3 U3.B3 ; U6.C8 v2(28.91,34.89) ; U6.N12 v2(38.89,37.89) ; U6.L8 v2(36.86,34.94) ; U6.K7 v2(35.89,33.91) ; U6.J8 v2(34.86,34.94) ; U3.E9 v1(31.49,55.54) ; U6.P14 v2(40.4,41.16) ; U6.A6 v2(26.91,32.89) ; U6.J10 v2(34.95,36.85) ; U6.H5 v2(34.9,30.9) ; U6.E1 v1(31.4,26.5) ; U6.G8 v2(32.86,34.94) ; U3.D1 v2(30.69,47.75) ; U6.B7 v2(28.9,33.9) ; J4.4 25.67,10.95 arc(25.71,10.9) 25.72,10.84 25.72,9.24 arc(25.79,9.02) 25.98,8.9 C82.2 ; U3.M1 v2(37.09,47.75) ; U3.P3 v2(39.08,49.8) ; U6.G7 v2(32.88,32.88) ; U6.A11 v2(26.84,37.96) ; U6.L11 v2(37.85,36.95) ; U3.L9 v1(36.29,55.54) ; U14.2 17.75,45.75 18,46 v1(18,47.6) ; U6.N5 v2(39.87,31.87) ; U6.L10 v2(36.85,36.95) ; U6.M9 v2(37.91,35.89) ; U3.F1 v2(32.29,47.74) ; U6.C9 v2(29.92,34.88) ; U6.A1 v1(26.6,27.4) ; U6.D7 v2(29.86,32.86) ; U6.L4 v2(37.89,29.91) ; v2(33.92,32.92) U6.G6 ; U6.P1 v2(41.27,27.4) ; U3.B8 v2(28.67,53.77) ; U6.H9 v2(33.9,35.9) ; U6.C13 v2(28.91,39.89) ; U6.L6 v2(36.9,32.9) ; U6.A9 v2(26.93,34.93)
  TOP w0.38: D9.1 v1(34.53,14.4) ; D9.1 v1(35.4,15.18) 35.4,15.63 35.76,15.99 v1(37.51,15.99) R38.2 ; D9.1 v1(36.28,14.4) ; C85.2 41.46,62.74 v1(40.99,63.21) D1.1 ; C85.2 v1(44.07,62.74) ; C85.2 v1(42.64,64.04) ; v1(31.49,55.54) 31.49,56.31 31.3,56.5 C5.2 ; v1(36.29,55.54) 36.29,55.91 36,56.2 C3.1 C6.2 ; v1(36.47,63.4) 36.86,63.01 U1.4 ; C1.2 26.95,58.78 26.7,58.53 C2.2 ; R17.1 v1(25.05,34.85) ; v1(25.12,33.3) 24.3,33.3 23.9,32.9 D4.1 ; D1.1 v1(39.2,63.21) ; D1.1 v1(40.09,63.99) ; v1(43.1,55.5) 43.1,56.5 42.5,57.1 C4.2 ; v1(20.62,31.45) 21.47,31.45 21.82,31.8 R22.1 ; R8.2 v1(47.82,41.65)
  TOP w0.4: C25.2 v1(64.1,26.63) ; C28.2 v1(62.6,22.83) ; C27.2 v1(63.4,24.63) ; C23.2 v1(64.6,28.63)
  TOP w0.42: C12.2 v1(6,38.1) ; C12.2 v1(4.6,39.4) ; C12.2 v1(7.4,39.4) ; v1(20.5,46.7) U14.6 v1(19.4,47.6) ; U15.2 v1(11.13,45.75) ; R57.1 7.32,44.7 v1(8,44.02) ; D2.1 v1(3.5,37.4)
  TOP w0.45: U9.5 v1(53.96,16) ; U9.5 v1(52.1,17.86) ; U9.5 52.61,16.64 52.61,16.64 v1(52.52,16.55)
  TOP w0.46: D7.1 v1(20.8,22.8) ; D7.1 v1(19.9,23.6) ; D7.1 v1(21.7,23.6)
  TOP w0.5: v1(15,14) D8.1 v1(16.2,12.8) ; v1(16.8,42.2) C10.2 v1(17.7,43.1) ; C84.2 v1(21.63,51.06) ; C84.2 v1(21.63,49.07) ; C84.2 v1(19.63,49.06) ; v1(18.84,59.83) U2.5 16.71,58.6 v1(16.2,58.6)
  BOTTOM w0.1: 34.7,33.9 34.86,33.9 v2(34.88,33.92)
  BOTTOM w0.3: D15.1 16.5,37.22 16.73,36.99 v1(16.73,36.63) ; v1(16.21,36.63) 16.21,36.22 16.5,35.93 D16.1 ; v2(26.91,32.89) 26.09,32.89 24.8,31.6 C59.2 24.8,29.78 24.6,29.58 C67.2 ; v2(32.9,30.9) C65.2 ; v2(34.88,33.92) 34.5,33.92 34.49,33.91 v1(33.89,33.91) ; C75.1 49.4,27.4 49.8,27.8 C74.1 v1(51.3,27.8) ; v2(34.9,30.9) 34.9,30.73 C66.2 ; C61.2 28.26,30.26 v2(27.9,29.9) ; v1(15.8,47.7) 15.32,47.7 14.8,47.18 R55.2 ; C48.2 36.82,54.2 36.3,54.72 36.3,54.9 36.29,54.91 v1(36.29,55.54) 36.29,56.01 36.3,56.02 C45.2 ; v2(27.92,34.92) 27.85,34.99 C53.2 27.8,35.2 27.2,35.2 v2(26.93,34.93)
  BOTTOM w0.38: C62.2 48.8,31.46 48.56,31.22 v1(47.81,31.22) ; C86.1 18,44 17.7,43.7 v1(17.7,43.1) ; v1(18.84,59.83) 19,59.67 C44.2
  BOTTOM w0.4: v1(31.4,26.5) 32,26.5 C72.2 C71.2 C70.2 36.2,26.9 v1(36.7,26.4) ; v1(21.02,38.69) 21.02,37.04 21.55,36.5 C54.2 ; C87.2 20.4,50.3 20.86,50.3 v1(21.63,51.06) ; C68.2 40.9,27.77 v2(41.27,27.4) ; v2(39.87,34.93) 40.07,34.93 40.4,34.6 C56.2 41.4,33.9 42,33.3 C60.2
  BOTTOM w0.46: v1(48.1,23.1) 48.75,23.1 R50.2
  BOTTOM w0.5: J3.8 12.81,43.25 13,43.44 C88.2 D17.1 v1(8,44.02) ; C80.2 26.18,17.3 v1(26.18,17.01) ; C42.2 v1(36.47,63.4) ; v1(29.16,62.98) 30.5,61.64 C43.2 ; v1(26.6,27.4) 26.6,26.9 26.9,26.6 C73.2 ; C12.2 v1(7.4,39.4) ; C12.2 v1(6,38.1) ; C12.2 v1(4.6,39.4) ; C78.2 30.73,19.65 v1(30.42,19.35) ; C50.2 v1(45.5,42.9) ; C50.2 44.82,42.1 44.62,41.9 C51.2 v1(44,42.9) ; C50.2 46.3,42.1 46.75,41.65 v1(47.82,41.65) ; C46.2 v1(43.1,55.5) ; C62.2 49.3,31.8 49.7,31.4 C63.2 ; R48.2 v1(20.5,59.8) ; C49.2 v1(43.6,52.7) ; v1(37.51,15.99) 37.51,16.79 37.3,17 C81.1 ; C69.2 30.7,27 31.2,26.5 v1(31.4,26.5) ; C47.2 v1(43.1,54.1) ; v1(26.06,19.26) 25.71,19.26 C76.2 ; v1(63.7,28.9) D11.1 63.7,27.3 v1(63.3,26.9) D12.1 63.3,25.7 v1(62.5,24.9) D13.1 62.5,23.8 v1(61.7,23) D14.1
  BOTTOM w0.6: U13.3 56.31,17.52 55.58,17.52 C79.1 54.29,18.81 54.14,18.81 C77.1 52.75,18.7 52.1,18.7 v1(51.7,18.3) 52.1,17.9 v1(52.1,17.86)
  BOTTOM w0.7: v1(17.65,54.95) U12.3 v1(14.32,58.28)
  vias: v1(4.54,23.43) v1(4.91,22.99) v1(5.07,23.68) v1(5.31,31.27) v1(5.31,30.13) v1(5.46,23.22) v1(5.68,30.7) v1(6.14,31.27) v1(6.16,30.13) v1(6.23,26.37) v1(6.23,25.76) v1(6.61,30.72) v1(7.09,31.27) v1(7.07,30.13) v1(9.73,25.82) v1(10.2,48.5) v1(10.28,25.73) v1(10.62,20.78) v1(10.68,21.34) v1(10.82,25.82) v1(11.5,18.55) v1(12.2,18.55) v1(13.7,18.55) v1(14.3,18.1) v1(14.9,17.6) v1(15.4,17.1) v1(15.9,16.6) v1(19.25,30.13) v1(19.33,31.49) v1(19.57,30.82) v1(19.99,31.83) v1(19.96,30.13) v1(20.11,39.27) v1(20.38,30.77) v1(20.7,39.27) v1(20.73,30.13) v1(21.33,39.27) v1(36.13,18.72) v1(36.49,18.31) v1(37.06,18.38) v1(38.58,12.43) v1(39.27,12.43) v1(40.73,17.49) v1(41.3,17.49) v1(41.93,17.49) v1(42.22,18.71) v1(42.22,18.05) v1(43.3,21.7) v1(43.31,4.55) v1(43.7,22.3) v1(44.03,20.93) v1(43.98,4.38) v1(44.1,21.7) v1(44.5,22.37) v1(44.65,4.49) v1(44.81,13.77) v1(44.78,11.2) v1(44.9,21.8) v1(45.02,10.76) v1(45.07,5.43) v1(45.3,11.2) v1(45.27,4.84) v1(45.39,14.73) v1(45.52,14.21) v1(45.52,13.69) v1(48.2,49.95) v1(48.2,47.3) v1(48.8,47.8) v1(48.8,46.9) v1(49.8,48.9) v1(50.5,49.3) v1(50.7,48.6) v1(51.1,35.3) v1(51.17,9.4) v1(51.65,8.42) v1(51.69,9.06) v1(51.9,35.33) v1(52.29,8.57) v1(52.48,26.77) v1(52.48,26.06) v1(52.46,25.31) v1(52.7,35.33) v1(53.02,42.21) v1(53.51,10.61) v1(53.66,42.2) v1(53.7,35.33) v1(53.93,41.68) v1(54.3,42.09) v1(54.6,35.6) v1(56.9,53.2) v1(56.95,40.34) v1(57.4,52.6) v1(57.9,53.2) v1(58.4,52.6) v1(58.8,52) v1(58.8,51.4) v1(58.8,50.8) v1(61.7,43.8) v1(61.7,42.6) v1(62.1,43.2) v1(62.5,43.8) v1(62.5,42.6) v1(62.9,43.2) v1(63.3,43.8) v1(63.3,42.6) v3(19.05,36.13)
A0: length 25
  TOP w0.1: U3.G8 33.09,54.18 32.73,53.82 32.73,53.82 v2(32.69,53.78) ; U6.B13 v2(27.9,39.9)
  BOTTOM w0.1: v2(27.9,39.9) 27.9,41.71 27.46,42.15 27.32,42.15 26.95,41.78 26.81,41.78 26.67,41.92 26.67,42.06 27.05,42.44 27.05,42.58 26.91,42.72 26.77,42.72 26.38,42.34 26.24,42.34 26.1,42.48 26.1,42.62 26.48,43.01 26.48,43.15 26.08,43.55 26.08,50.4 27.9,52.23 30.61,52.23 30.79,52.4 30.79,52.54 30.5,52.83 30.5,52.97 30.64,53.11 30.79,53.11 31.07,52.83 31.21,52.83 31.36,52.97 31.36,53.11 31.07,53.4 31.07,53.54 31.21,53.68 31.35,53.68 31.64,53.39 31.78,53.39 32.17,53.78 v2(32.69,53.78)
A1: length 25
  TOP w0.1: U6.A13 v2(26.88,39.92) ; v2(32.69,54.59) U3.G9
  BOTTOM w0.1: v2(32.69,54.59) 29.24,54.59 29.14,54.69 29.14,55.87 29.04,55.97 28.84,55.97 28.74,55.87 28.74,54.69 28.64,54.59 28.14,54.59 25.09,51.54 25.09,41.71 v2(26.88,39.92)
A2: length 25
  TOP w0.1: v2(32.29,52.84) U3.F7 ; U6.D12 v2(29.88,38.92)
  BOTTOM w0.1: v2(29.88,38.92) 29.88,41.82 28.91,42.79 28.76,42.79 28.3,42.33 28.16,42.33 28.02,42.47 28.02,42.61 28.48,43.07 28.48,43.21 28.34,43.35 28.2,43.35 27.74,42.89 27.59,42.89 27.45,43.03 27.45,43.17 27.92,43.64 27.92,43.78 27.4,44.29 27.26,44.29 26.92,43.95 26.77,43.95 26.63,44.09 26.63,44.23 26.98,44.58 26.98,44.72 26.53,45.16 26.53,50.09 28.1,51.65 31.48,51.65 32.29,52.46 v2(32.29,52.84)
A3: length 26.2
  TOP w0.1: v2(30.88,37.92) U6.E11 ; v2(31.9,49.8) U3.F3
  BOTTOM w0.1: v2(31.9,49.8) 30.98,49.8 30.68,49.5 30.68,48.57 30.28,48.17 30.28,47.36 30.13,47.2 28.95,47.2 28.85,47.1 28.85,46.99 28.75,46.89 27.86,46.89 27.76,46.79 27.76,46.48 27.86,46.38 28.75,46.38 28.85,46.28 28.85,45.64 29.01,45.48 29.15,45.48 29.53,45.86 29.53,46.01 29.23,46.31 29.23,46.45 29.37,46.6 29.51,46.6 29.82,46.29 29.96,46.29 30.22,46.55 30.36,46.55 30.5,46.4 30.5,46.26 29.43,45.2 29.43,45.06 29.66,44.83 29.8,44.83 30.08,45.11 30.22,45.11 30.37,44.97 30.37,44.83 30.09,44.55 30.09,44.4 30.23,44.26 30.37,44.26 30.65,44.54 30.79,44.54 30.93,44.4 30.93,44.26 30.65,43.98 30.65,43.84 32.38,42.12 32.38,38.8 32.01,38.43 31.39,38.43 v2(30.88,37.92)
A4: length 26.1
  TOP w0.1: v2(35.79,37.79) U6.J11 ; U3.G1 v2(33.09,47.75)
  BOTTOM w0.1: v2(33.09,47.75) 33.09,46.05 36.4,42.74 36.4,41.87 35.89,41.35 35.89,40.91 36.1,40.7 36.1,40.32 35.4,39.62 35.4,38.62 35.19,38.41 34.6,38.41 34.39,38.2 34.39,37.66 34.17,37.44 31.62,37.44 31.35,37.18 31.35,35.65 31.6,35.4 35.16,35.4 35.34,35.58 35.34,37.92 35.43,38.02 35.55,38.02 v2(35.79,37.79)
A5: length 25.6
  TOP w0.1: v2(32.7,49) U3.G2 ; U6.J12 v2(34.89,38.91)
  BOTTOM w0.1: v2(34.89,38.91) 34.89,39.99 34.79,40.09 34.45,40.09 34.35,40.19 34.35,40.41 34.45,40.51 35.48,40.51 35.55,40.58 35.55,40.82 35.48,40.89 34.44,40.89 34.34,40.99 34.34,41.19 34.44,41.29 34.79,41.29 34.89,41.39 34.89,41.58 34.99,41.68 35.65,41.68 35.75,41.78 35.75,41.98 35.65,42.08 35.42,42.08 35.32,42.18 35.32,42.57 35.22,42.67 35.02,42.67 34.92,42.57 34.92,42.18 34.82,42.08 34.49,42.08 34.34,42.23 34.34,42.58 34.91,43.15 34.91,43.29 34.77,43.43 34.62,43.43 34.12,42.93 33.98,42.93 33.84,43.08 33.84,43.22 34.06,43.44 34.07,43.44 34.45,43.82 34.45,43.96 34.3,44.1 34.16,44.1 33.56,43.5 33.42,43.5 33.31,43.61 33.31,43.75 34,44.44 34,44.58 33.83,44.76 33.69,44.76 32.99,44.07 32.85,44.07 32.69,44.23 32.69,44.92 32.59,45.02 31.74,45.02 31.64,45.12 31.64,45.37 31.74,45.47 32.59,45.47 32.69,45.57 32.69,46.92 32.7,46.93 v2(32.7,49)
A6: length 25.9
  TOP w0.1: U3.G3 32.7,49.8 v2(32.68,49.8) ; U6.G11 v2(33.91,37.91)
  BOTTOM w0.1: v2(33.91,37.91) 33.91,39.5 33.81,39.6 33.01,39.6 32.91,39.7 32.91,39.9 33.01,40 33.81,40 33.91,40.1 33.91,40.3 33.81,40.4 33.01,40.4 32.91,40.5 32.91,40.7 33.01,40.8 33.81,40.8 33.91,40.9 33.91,41.1 33.81,41.2 33.01,41.2 32.91,41.3 32.91,41.5 33.01,41.6 33.81,41.6 33.91,41.7 33.91,42.25 32.86,43.3 32.72,43.3 32.4,42.98 32.26,42.98 32.11,43.12 32.11,43.26 32.44,43.58 32.44,43.72 32.29,43.87 32.15,43.87 31.83,43.54 31.69,43.54 31.55,43.68 31.55,43.83 31.74,44.02 31.74,44.19 30.89,45.04 30.89,45.62 31.2,45.93 31.88,45.93 31.98,46.03 31.98,46.23 31.88,46.33 31.2,46.33 31.1,46.43 31.1,46.63 31.2,46.73 31.88,46.73 31.98,46.83 31.98,47.03 31.88,47.13 31.2,47.13 31.1,47.23 31.1,48.24 31.46,48.6 31.46,49.25 31.6,49.39 32.26,49.39 v2(32.68,49.8)
A7: length 25.6
  TOP w0.1: U3.H1 v2(33.89,47.75) ; U6.L12 v2(37.88,38.88)
  BOTTOM w0.1: v2(33.89,47.75) 33.89,46.55 35.35,45.09 35.49,45.09 36.06,45.66 36.2,45.66 36.34,45.52 36.34,45.37 35.77,44.81 35.77,44.67 35.92,44.53 36.06,44.53 36.62,45.09 36.76,45.09 36.91,44.95 36.91,44.81 36.34,44.24 36.34,44.1 36.48,43.96 36.62,43.96 37.19,44.52 37.33,44.52 37.47,44.38 37.47,44.24 36.91,43.68 36.91,43.53 37.05,43.39 37.19,43.39 37.7,43.9 37.84,43.9 37.97,43.78 37.97,43.61 37.47,43.11 37.47,42.88 37.91,42.44 37.91,42.3 37.78,42.17 37.4,42.17 37.28,42.06 37.28,41.86 37.38,41.76 37.94,41.76 38.04,41.66 38.04,41.51 37.94,41.41 37.34,41.41 37.24,41.31 37.24,41.17 37.34,41.07 38.02,41.07 38.09,41 38.09,40.86 38.01,40.78 37.33,40.78 37.23,40.68 37.23,40.58 37.34,40.47 38.01,40.47 38.08,40.4 38.08,40.26 37.99,40.16 37.36,40.16 37.27,40.07 37.27,39.91 37.37,39.81 37.99,39.81 38.09,39.7 38.09,39.6 38.02,39.53 37.4,39.53 37.29,39.42 37.29,39.28 37.38,39.19 37.8,39.19 37.88,39.1 v2(37.88,38.88)
A8: length 24.9
  TOP w0.1: U3.H2 v2(33.5,49) ; v2(36.87,37.87) U6.K11
  BOTTOM w0.1: v2(33.5,49) 33.5,46.34 36.9,42.95 36.9,38.95 36.37,38.42 36.37,34.17 36.79,33.75 38.14,33.75 38.39,34 38.39,37.15 38.12,37.43 37.7,37.43 37.25,37.87 v2(36.87,37.87)
A9: length 25.2
  TOP w0.1: v2(39.9,37.9) U6.N11 ; U3.J3 v2(35.08,49.8)
  BOTTOM w0.1: v2(39.9,37.9) 39.35,38.46 39.35,40.17 39.56,40.39 40.05,40.39 40.23,40.2 40.5,40.2 40.57,40.27 40.57,40.61 40.45,40.73 39.94,40.73 39.79,40.88 39.79,41.1 39.98,41.3 39.98,41.56 39.88,41.66 39.76,41.66 39.71,41.71 39.71,41.87 39.9,42.06 40.02,42.06 40.12,41.95 40.12,41.85 40.22,41.75 40.36,41.75 40.46,41.85 40.46,42.38 40.57,42.49 40.57,42.78 40.46,42.89 40.46,43.18 40.57,43.29 40.57,43.58 40.46,43.69 40.46,43.98 40.57,44.09 40.57,44.38 40.46,44.49 40.46,44.96 40.36,45.06 40.29,45.06 40.19,45.16 40.19,45.36 40.29,45.46 40.36,45.46 40.46,45.56 40.46,45.76 40.36,45.86 40.29,45.86 40.19,45.96 40.19,46.16 40.29,46.26 40.36,46.26 40.46,46.36 40.46,46.56 40.36,46.66 40.29,46.66 40.19,46.76 40.19,46.96 40.29,47.06 40.36,47.06 40.46,47.16 40.46,47.39 40.23,47.62 38.71,47.62 38.15,48.18 37.39,48.18 37.29,48.28 37.29,48.48 37.19,48.58 36.99,48.58 36.89,48.48 36.89,48.28 36.79,48.18 36.59,48.18 36.49,48.28 36.49,48.48 36.39,48.58 36.19,48.58 36.09,48.48 36.09,48.34 35.99,48.24 34.9,48.24 34.8,48.34 34.8,48.69 34.9,48.79 35.36,48.79 35.46,48.89 35.46,49.09 35.36,49.19 34.9,49.19 34.8,49.29 34.8,49.51 v2(35.08,49.8)
A10: length 24.9
  TOP w0.1: v2(33.1,52.84) 33.1,52.84 33.1,53.38 U3.G7 ; U6.E12 v2(30.89,38.91)
  BOTTOM w0.1: v2(33.1,52.84) 33.1,52.29 32.12,51.3 28.59,51.3 26.94,49.65 26.94,45.76 28.66,44.03 28.66,43.89 28.65,43.88 28.65,43.74 28.79,43.59 28.93,43.59 29.1,43.77 29.25,43.77 29.39,43.63 29.39,43.48 29.21,43.31 29.21,43.17 29.36,43.03 29.5,43.03 29.67,43.2 29.81,43.2 29.95,43.06 29.95,42.92 29.78,42.74 29.78,42.6 29.92,42.46 30.06,42.46 30.08,42.48 30.22,42.48 30.89,41.81 30.89,40.9 30.79,40.8 30.39,40.8 30.29,40.7 30.29,40.5 30.39,40.4 30.79,40.4 30.89,40.3 30.89,40.1 30.79,40 30.39,40 30.29,39.9 30.29,39.7 30.39,39.6 30.79,39.6 30.89,39.5 v2(30.89,38.91)
A11: length 24.8
  TOP w0.1: U3.H9 v2(33.46,54.56) ; U6.C12 v2(28.91,38.89)
  BOTTOM w0.1: v2(33.46,54.56) 33.1,54.2 30.8,54.2 30,53.4 28.05,53.4 25.59,50.94 25.59,42.12 27.4,40.31 27.4,39.2 27.71,38.89 v2(28.91,38.89)
AUX_PWR_EN: length 21
  TOP w0.1: U6.C3 v2(28.9,28.9)
  SIGNAL-4 w0.1: 25.35,28.4 28.4,28.4 v2(28.9,28.9)
  SIGNAL-4 w0.152: v1(23.3,28.4) 25.35,28.4
  BOTTOM w0.152: v1(23.3,28.4) 22.8,28.4 21.5,29.7 21.5,32.9 20.4,34 16.2,34 15.75,34.45 D16.2
  BOTTOM w0.3: J1.10 14.73,35.08 D16.2
BA0: length 25.4
  TOP w0.1: U6.P11 v2(40.9,37.9) ; U3.J7 v2(34.69,52.84)
  BOTTOM w0.1: v2(34.69,52.84) 34.69,51.85 34.79,51.75 34.89,51.75 35.08,51.56 35.08,51.42 34.76,51.09 34.76,50.95 34.83,50.88 34.97,50.88 35.33,51.24 35.47,51.24 35.59,51.12 35.59,50.98 35.32,50.71 35.32,50.62 35.49,50.46 35.63,50.46 35.86,50.68 36.01,50.68 36.11,50.59 36.11,50.44 35.94,50.28 35.94,50.14 36.05,50.04 36.2,50.04 36.53,50.37 37.62,50.37 37.86,50.13 37.86,49.6 38.07,49.39 40.17,49.39 41.22,48.35 41.22,39.09 41.12,38.99 40.45,38.99 40.36,38.89 40.36,38.69 40.45,38.59 41.12,38.59 41.22,38.49 41.22,38.22 v2(40.9,37.9)
BA1: length 25.6
  TOP w0.1: U6.F12 v2(31.88,38.92) ; v2(33.48,53.78) U3.H8
  BOTTOM w0.1: v2(33.48,53.78) 33.48,53.4 33.68,53.2 33.68,52.17 33.29,51.78 33.29,51.64 33.76,51.17 33.76,51.03 33.62,50.89 33.48,50.89 33.01,51.36 32.87,51.36 32.73,51.21 32.73,51.07 33.09,50.71 33.09,50.53 32.99,50.43 32.81,50.43 32.45,50.79 32.3,50.79 32.22,50.7 32,50.7 31.5,50.2 28.1,50.2 27.33,49.43 27.33,46.29 31.88,41.74 v2(31.88,38.92)
CAS: length 25.6
  TOP w0.1: v2(39.9,36.9) U6.N10 ; U3.K7 v2(35.49,52.84)
  BOTTOM w0.1: v2(35.49,52.84) 35.49,52.39 35.75,52.13 35.75,51.9 35.92,51.73 36.15,51.73 36.32,51.56 36.32,51.34 36.49,51.17 38.88,51.17 38.98,51.07 38.98,50.77 39.08,50.67 39.28,50.67 39.38,50.77 39.38,51.07 39.48,51.17 39.71,51.17 41.92,48.95 41.92,37.78 41.05,36.9 40.59,36.9 40.2,36.51 40.2,36.39 40.1,36.29 39.67,36.29 39.58,36.39 39.58,36.83 39.65,36.9 v2(39.9,36.9)
CCLK: length 32.9
  TOP w0.25: R1.1 26.95,61.47 26.52,61.04 v1(26.52,60.77) ; v1(26.5,34.4) U6.A8
  BOTTOM w0.152: v1(26.5,34.4) 26.02,34.4 25.59,34.83 25.59,35.48 22.51,38.56 22.51,41.89 21.5,42.9 21.5,43.9 22.64,45.04 22.64,55.53 26.52,59.41 v1(26.52,60.77)
CLK_100M: length 12.9
  TOP w0.16: Y1.3 41.1,21.66 40.46,22.3 39.28,22.3 35.9,25.68 35.9,28.7 35.7,28.9 34.9,28.9 U6.H3
CS: length 25.1
  TOP w0.1: U6.P12 v2(39.89,38.91) ; U3.J8 v2(34.29,53.79)
  BOTTOM w0.1: v2(39.89,38.91) 40.87,39.89 40.87,48.06 40.39,48.54 37.92,48.54 37.05,49.4 36.11,49.4 35.22,50.29 34.7,50.29 33.89,49.48 33.49,49.48 33.25,49.72 33.25,50 33.68,50.43 33.82,50.43 34,50.26 34.14,50.26 34.28,50.4 34.28,50.54 34.11,50.71 34.11,50.85 34.35,51.1 34.35,51.41 34.17,51.59 34.17,53.3 34.29,53.41 v2(34.29,53.79)
